# Altium PCB Tigershark 3D R1.8.PcbDoc (part 1 of 3)
Units mil, origin at the board's own origin, x right, y up, seen from the top; angles counter-clockwise.
Board outline 5500 x 4600 mil, 4 copper layers (Top Layer, Groun Plane, Power Plane, Bottom Layer), stack 61.73 mil thick; 307 components, 236 nets, 994 pads, 1215 vias.
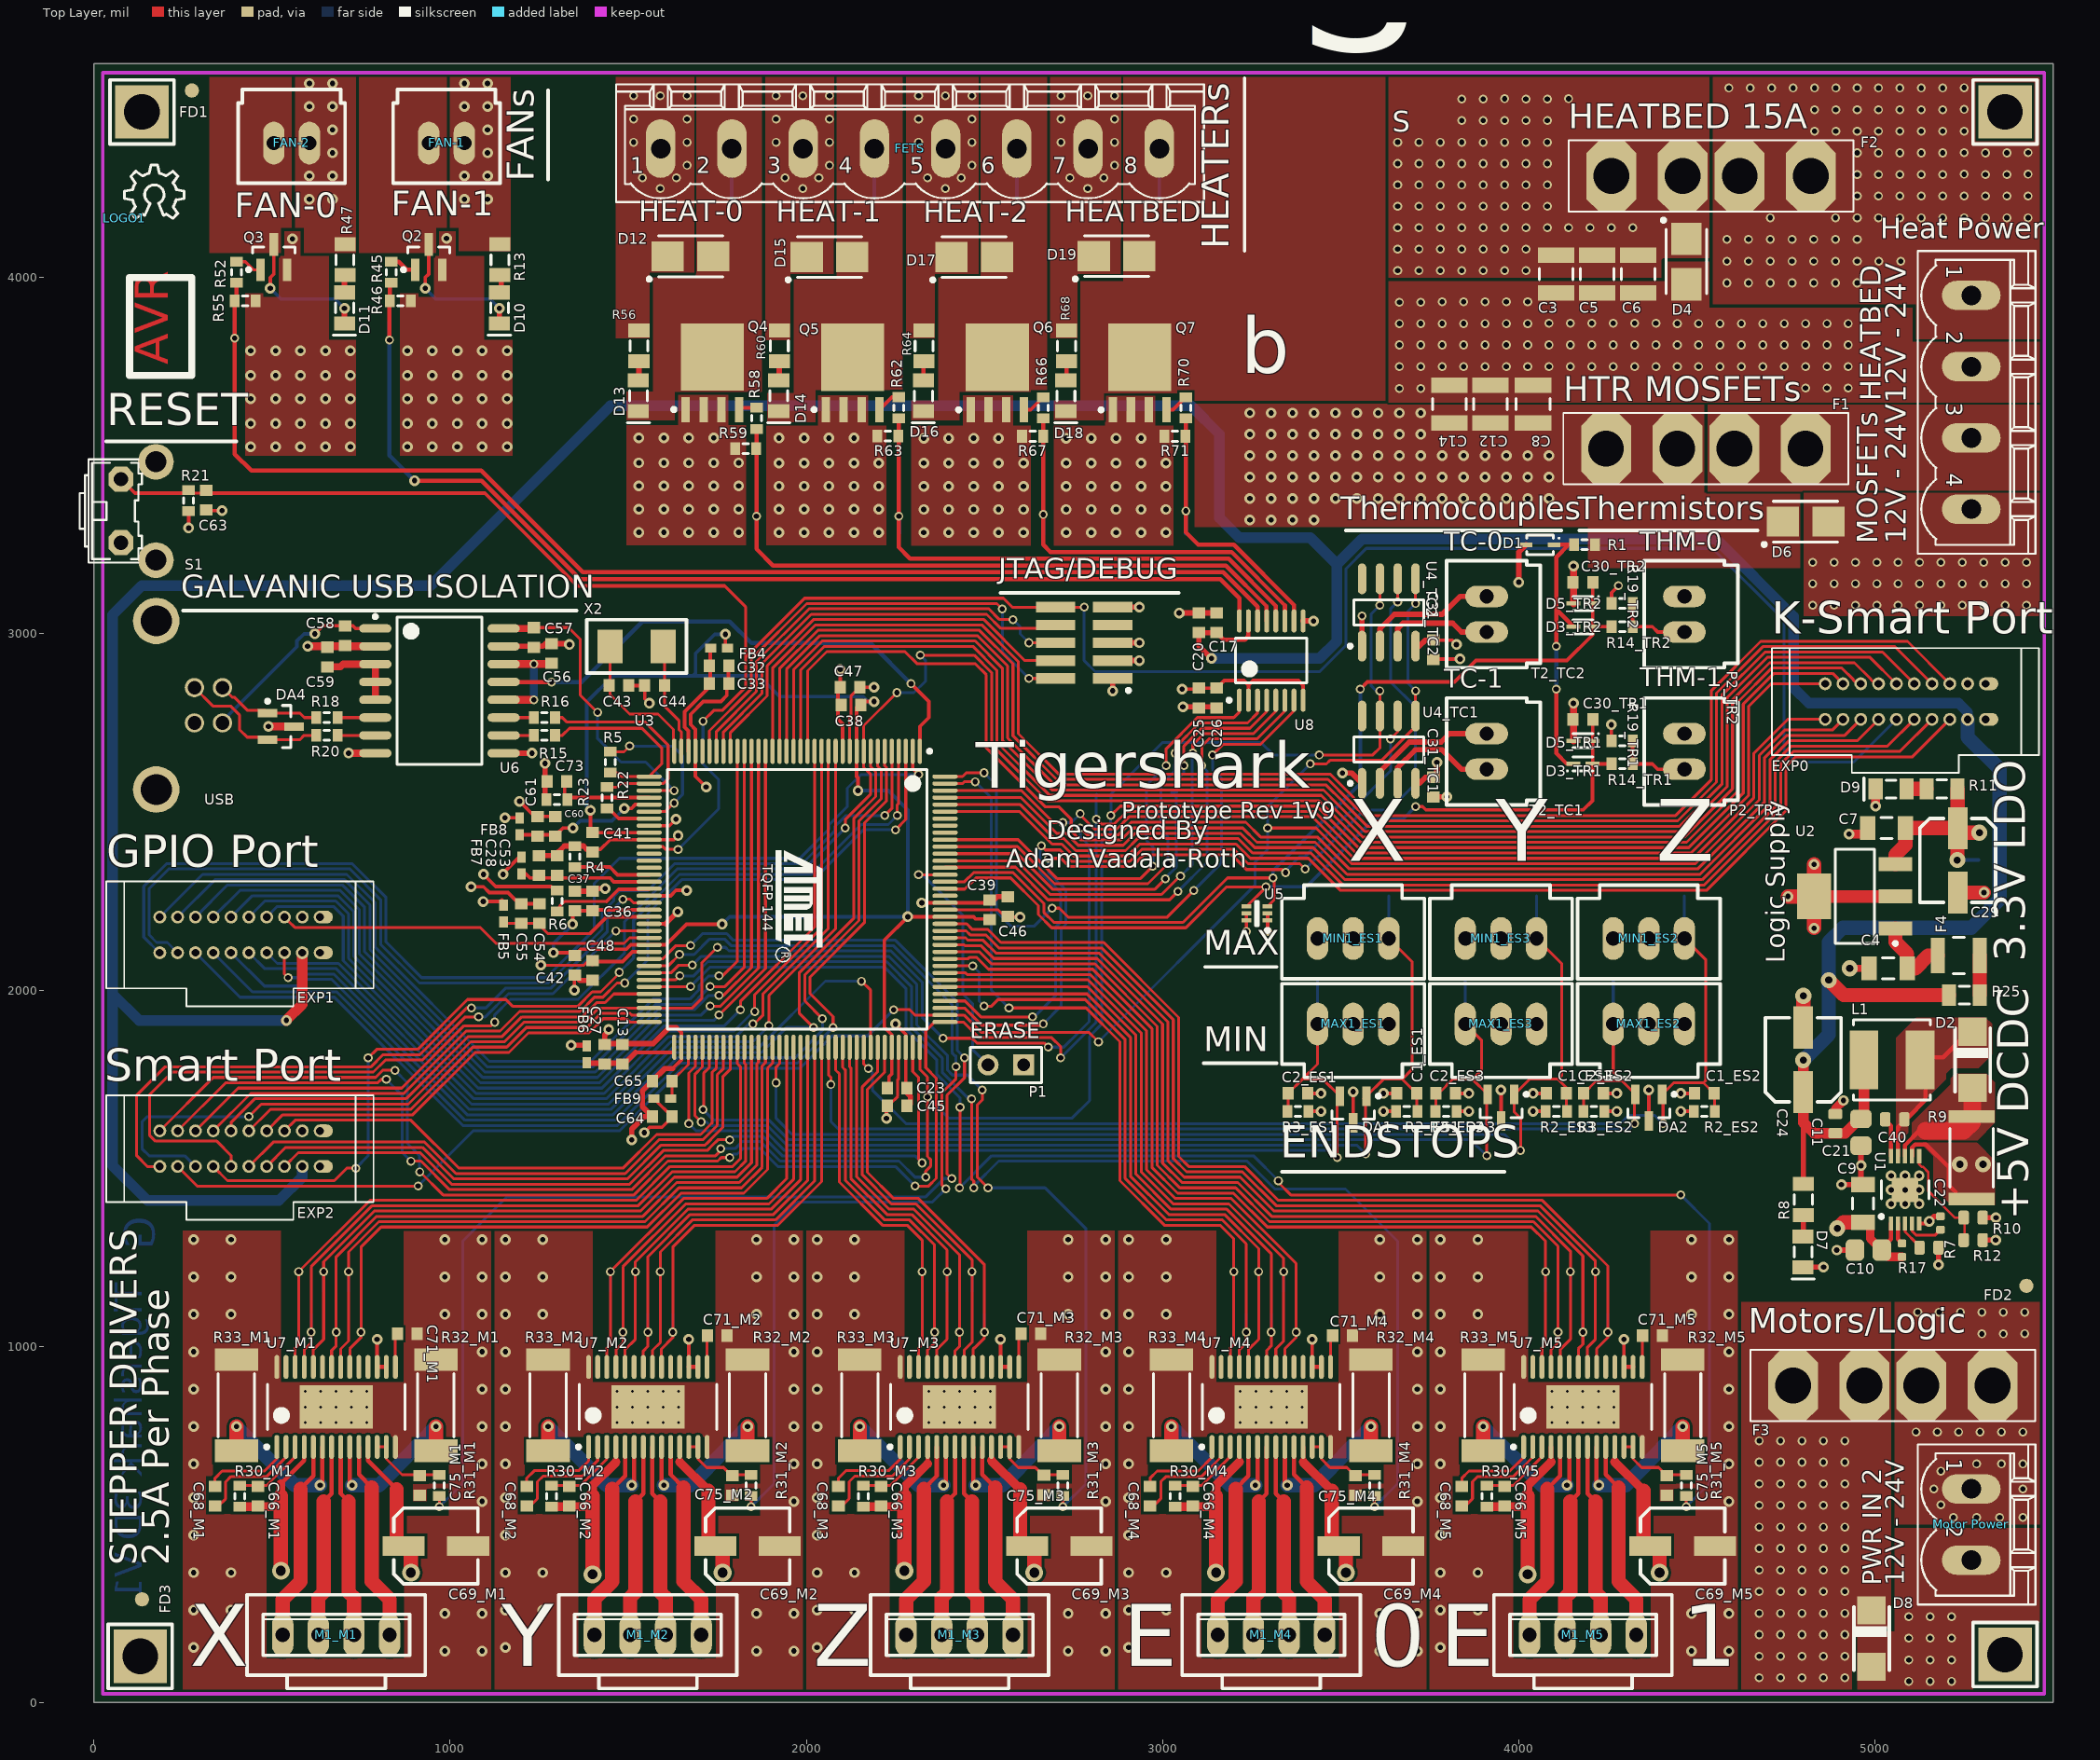
[diagram p0: Top Layer view]
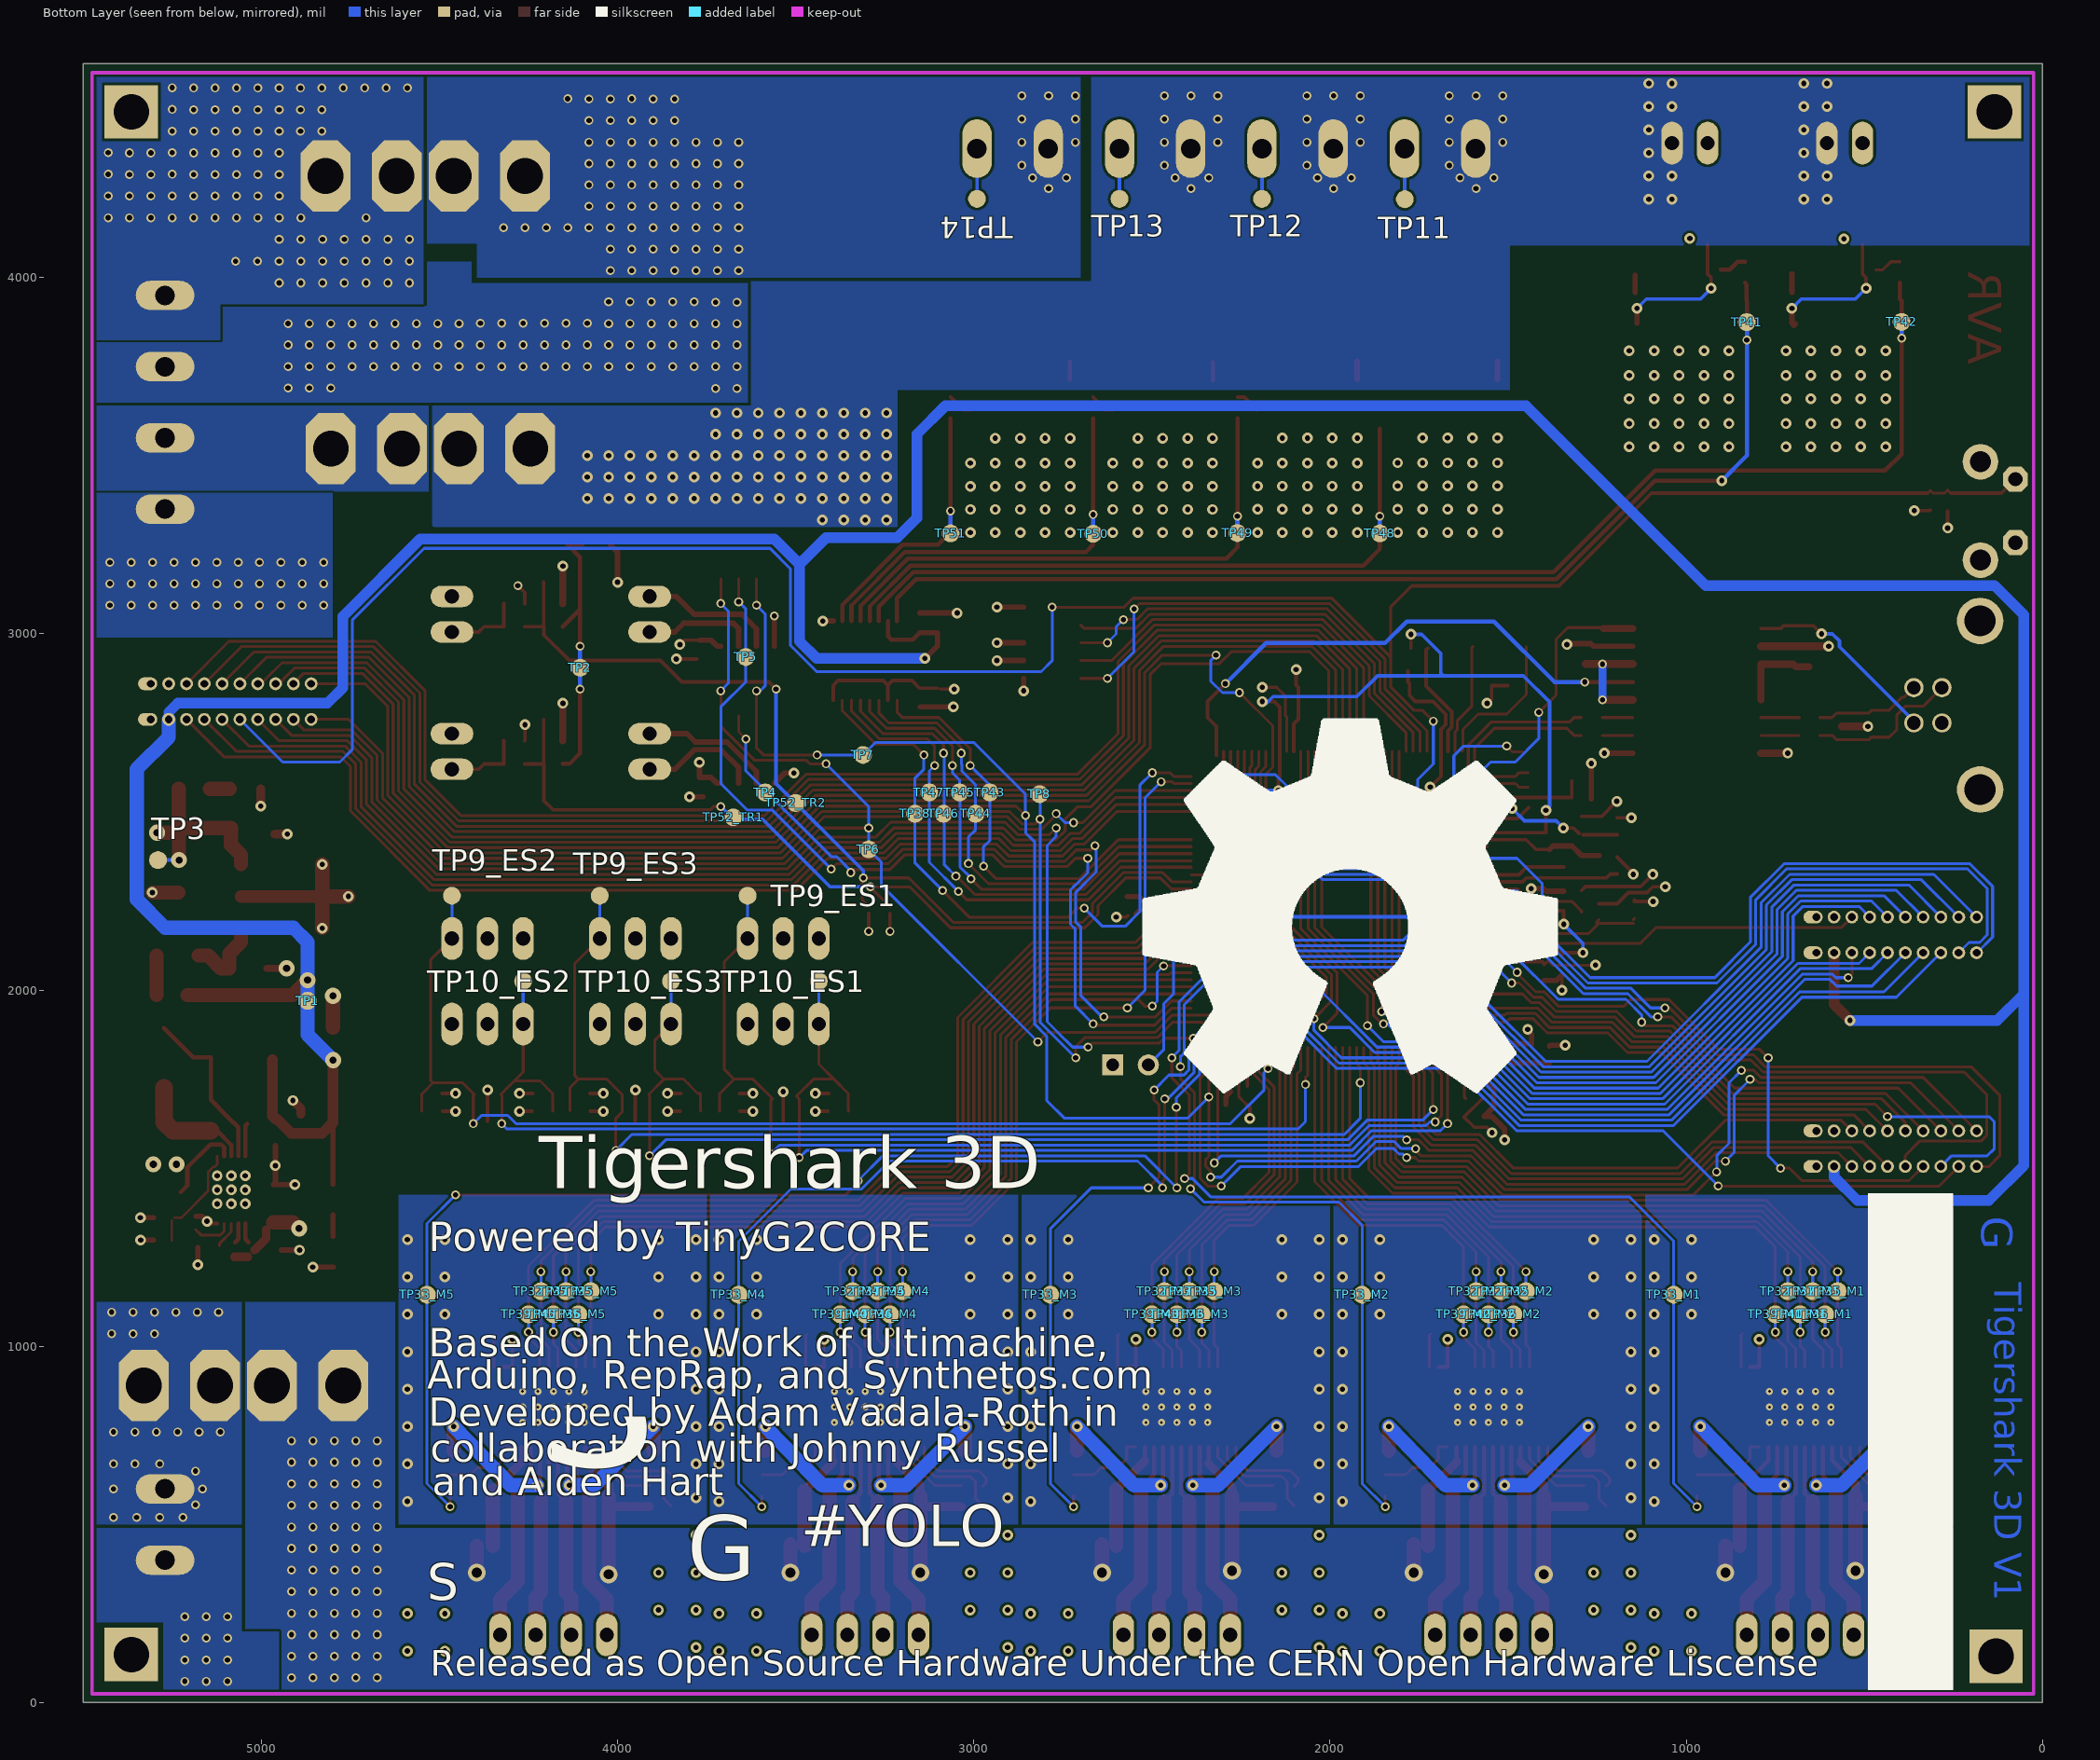
[diagram p1: Bottom Layer view, seen from below]
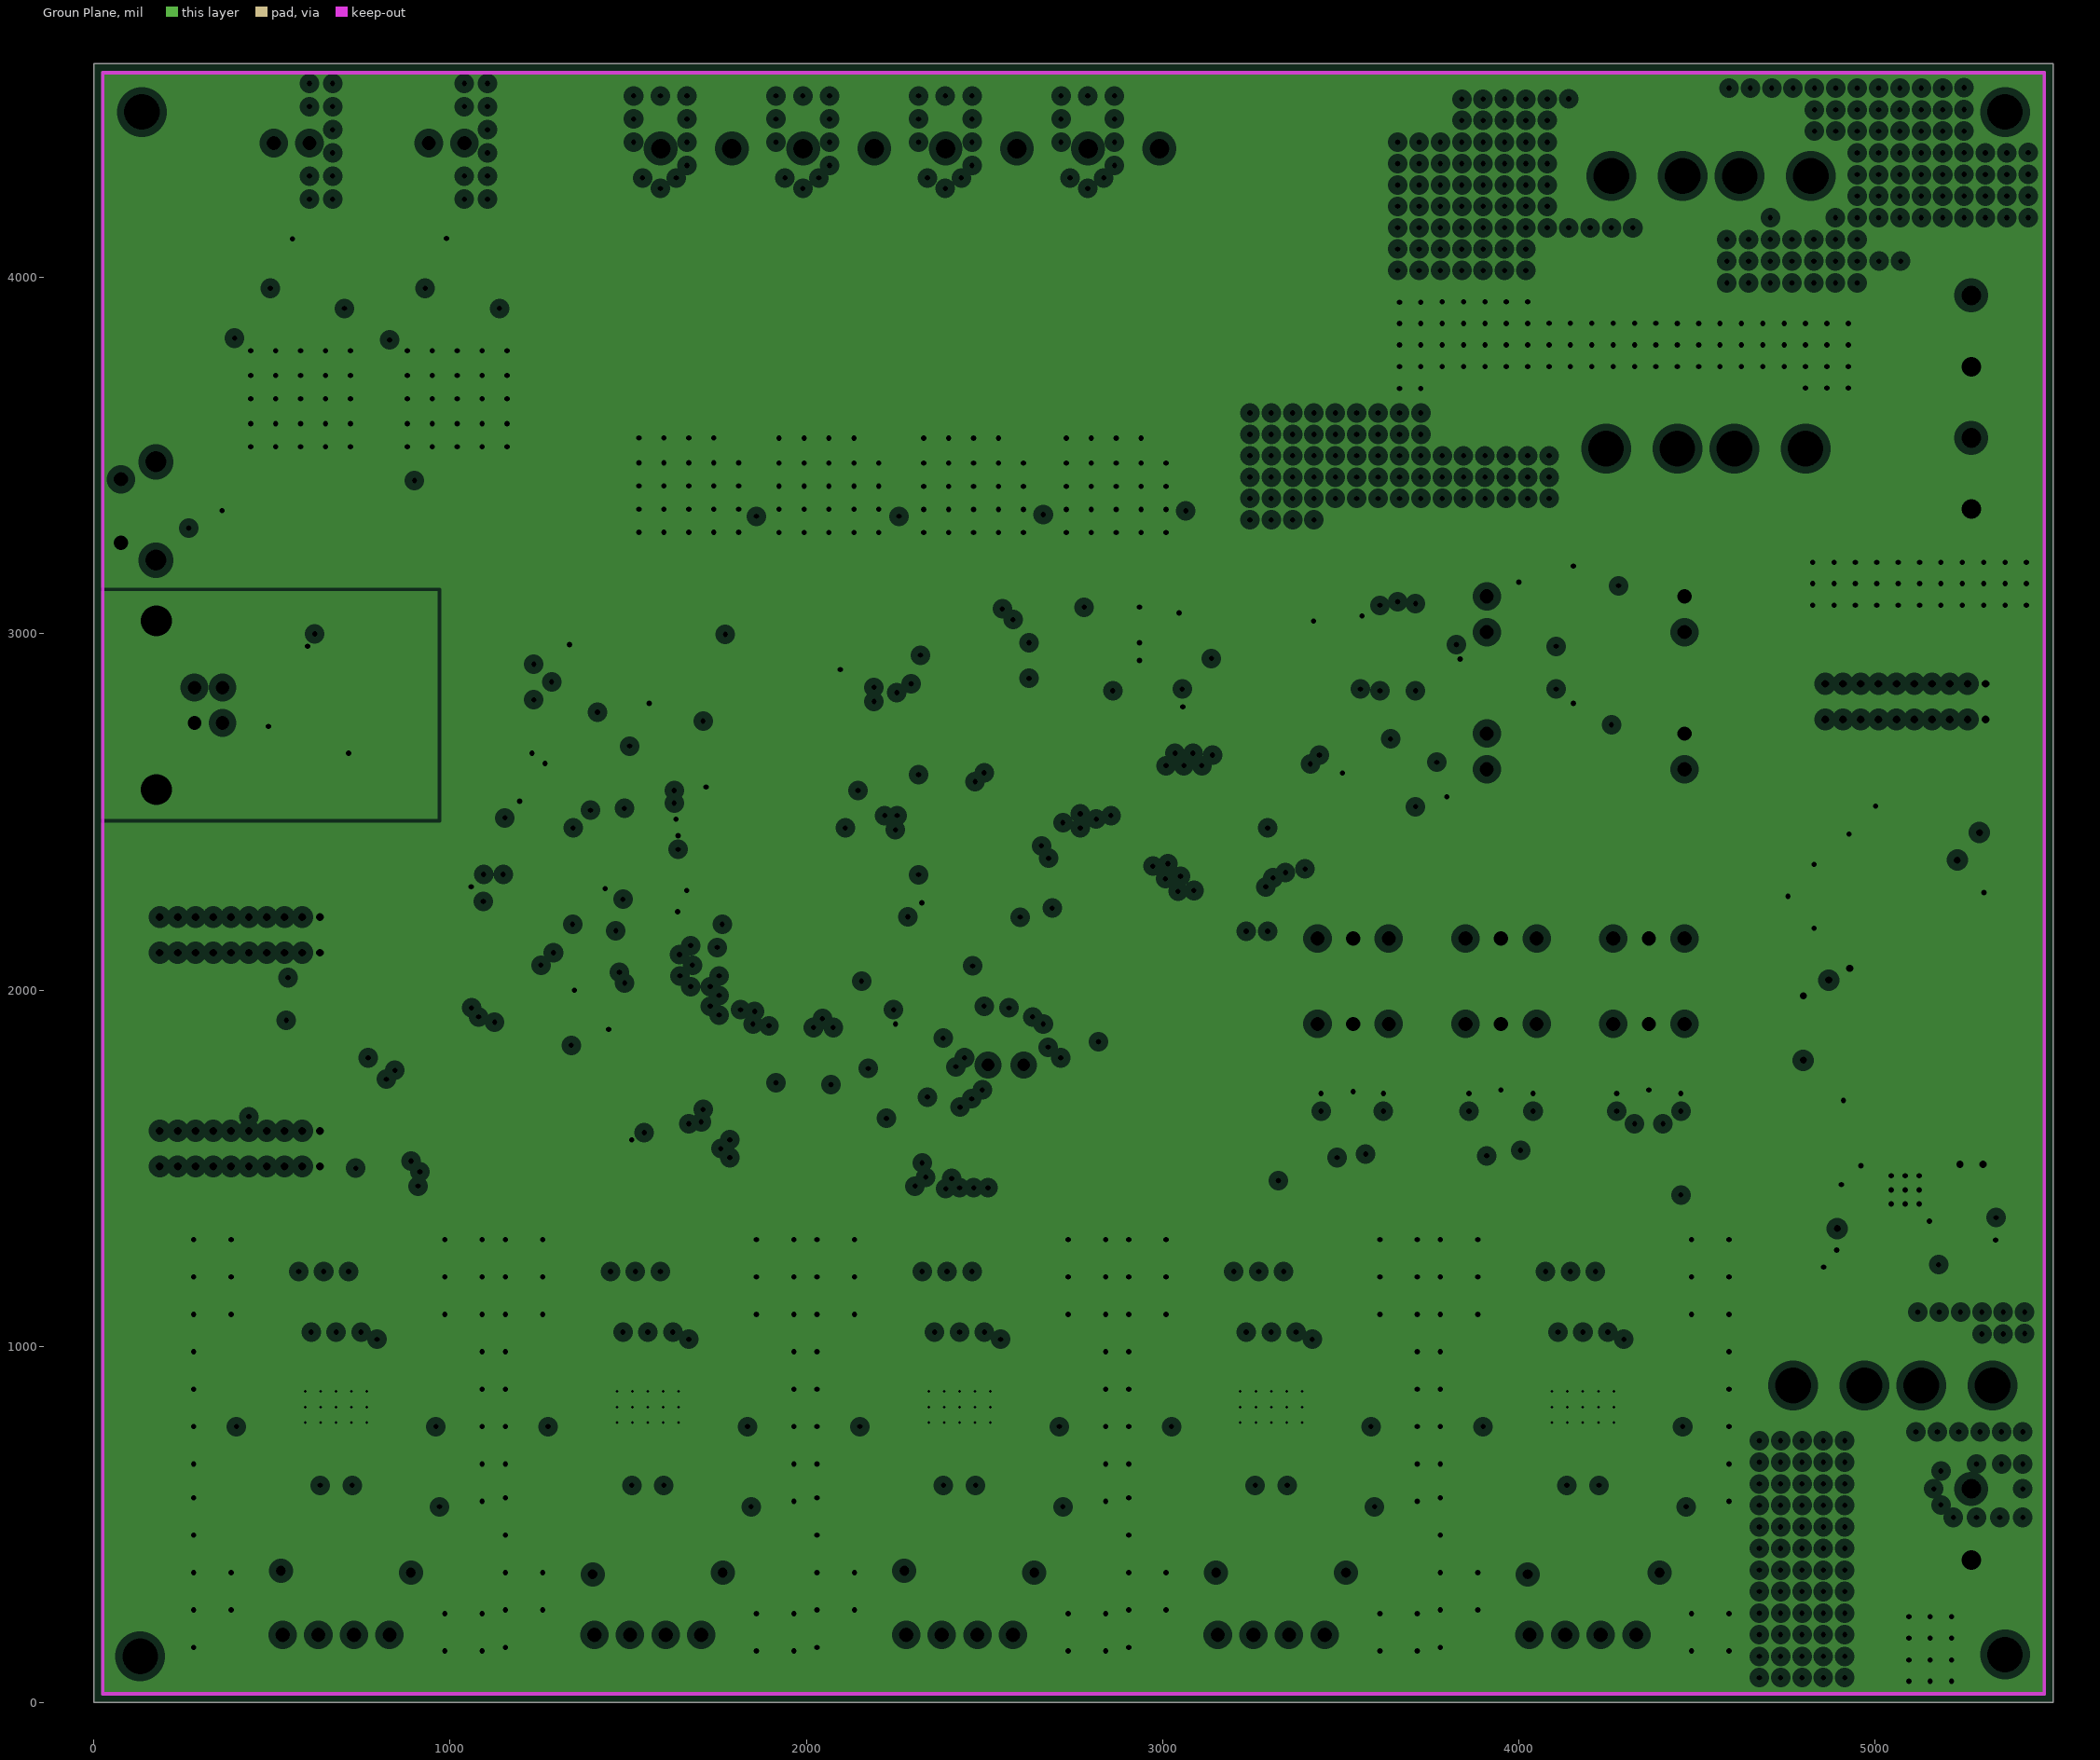
[diagram p2: Groun Plane, clearances drawn from the general rule]
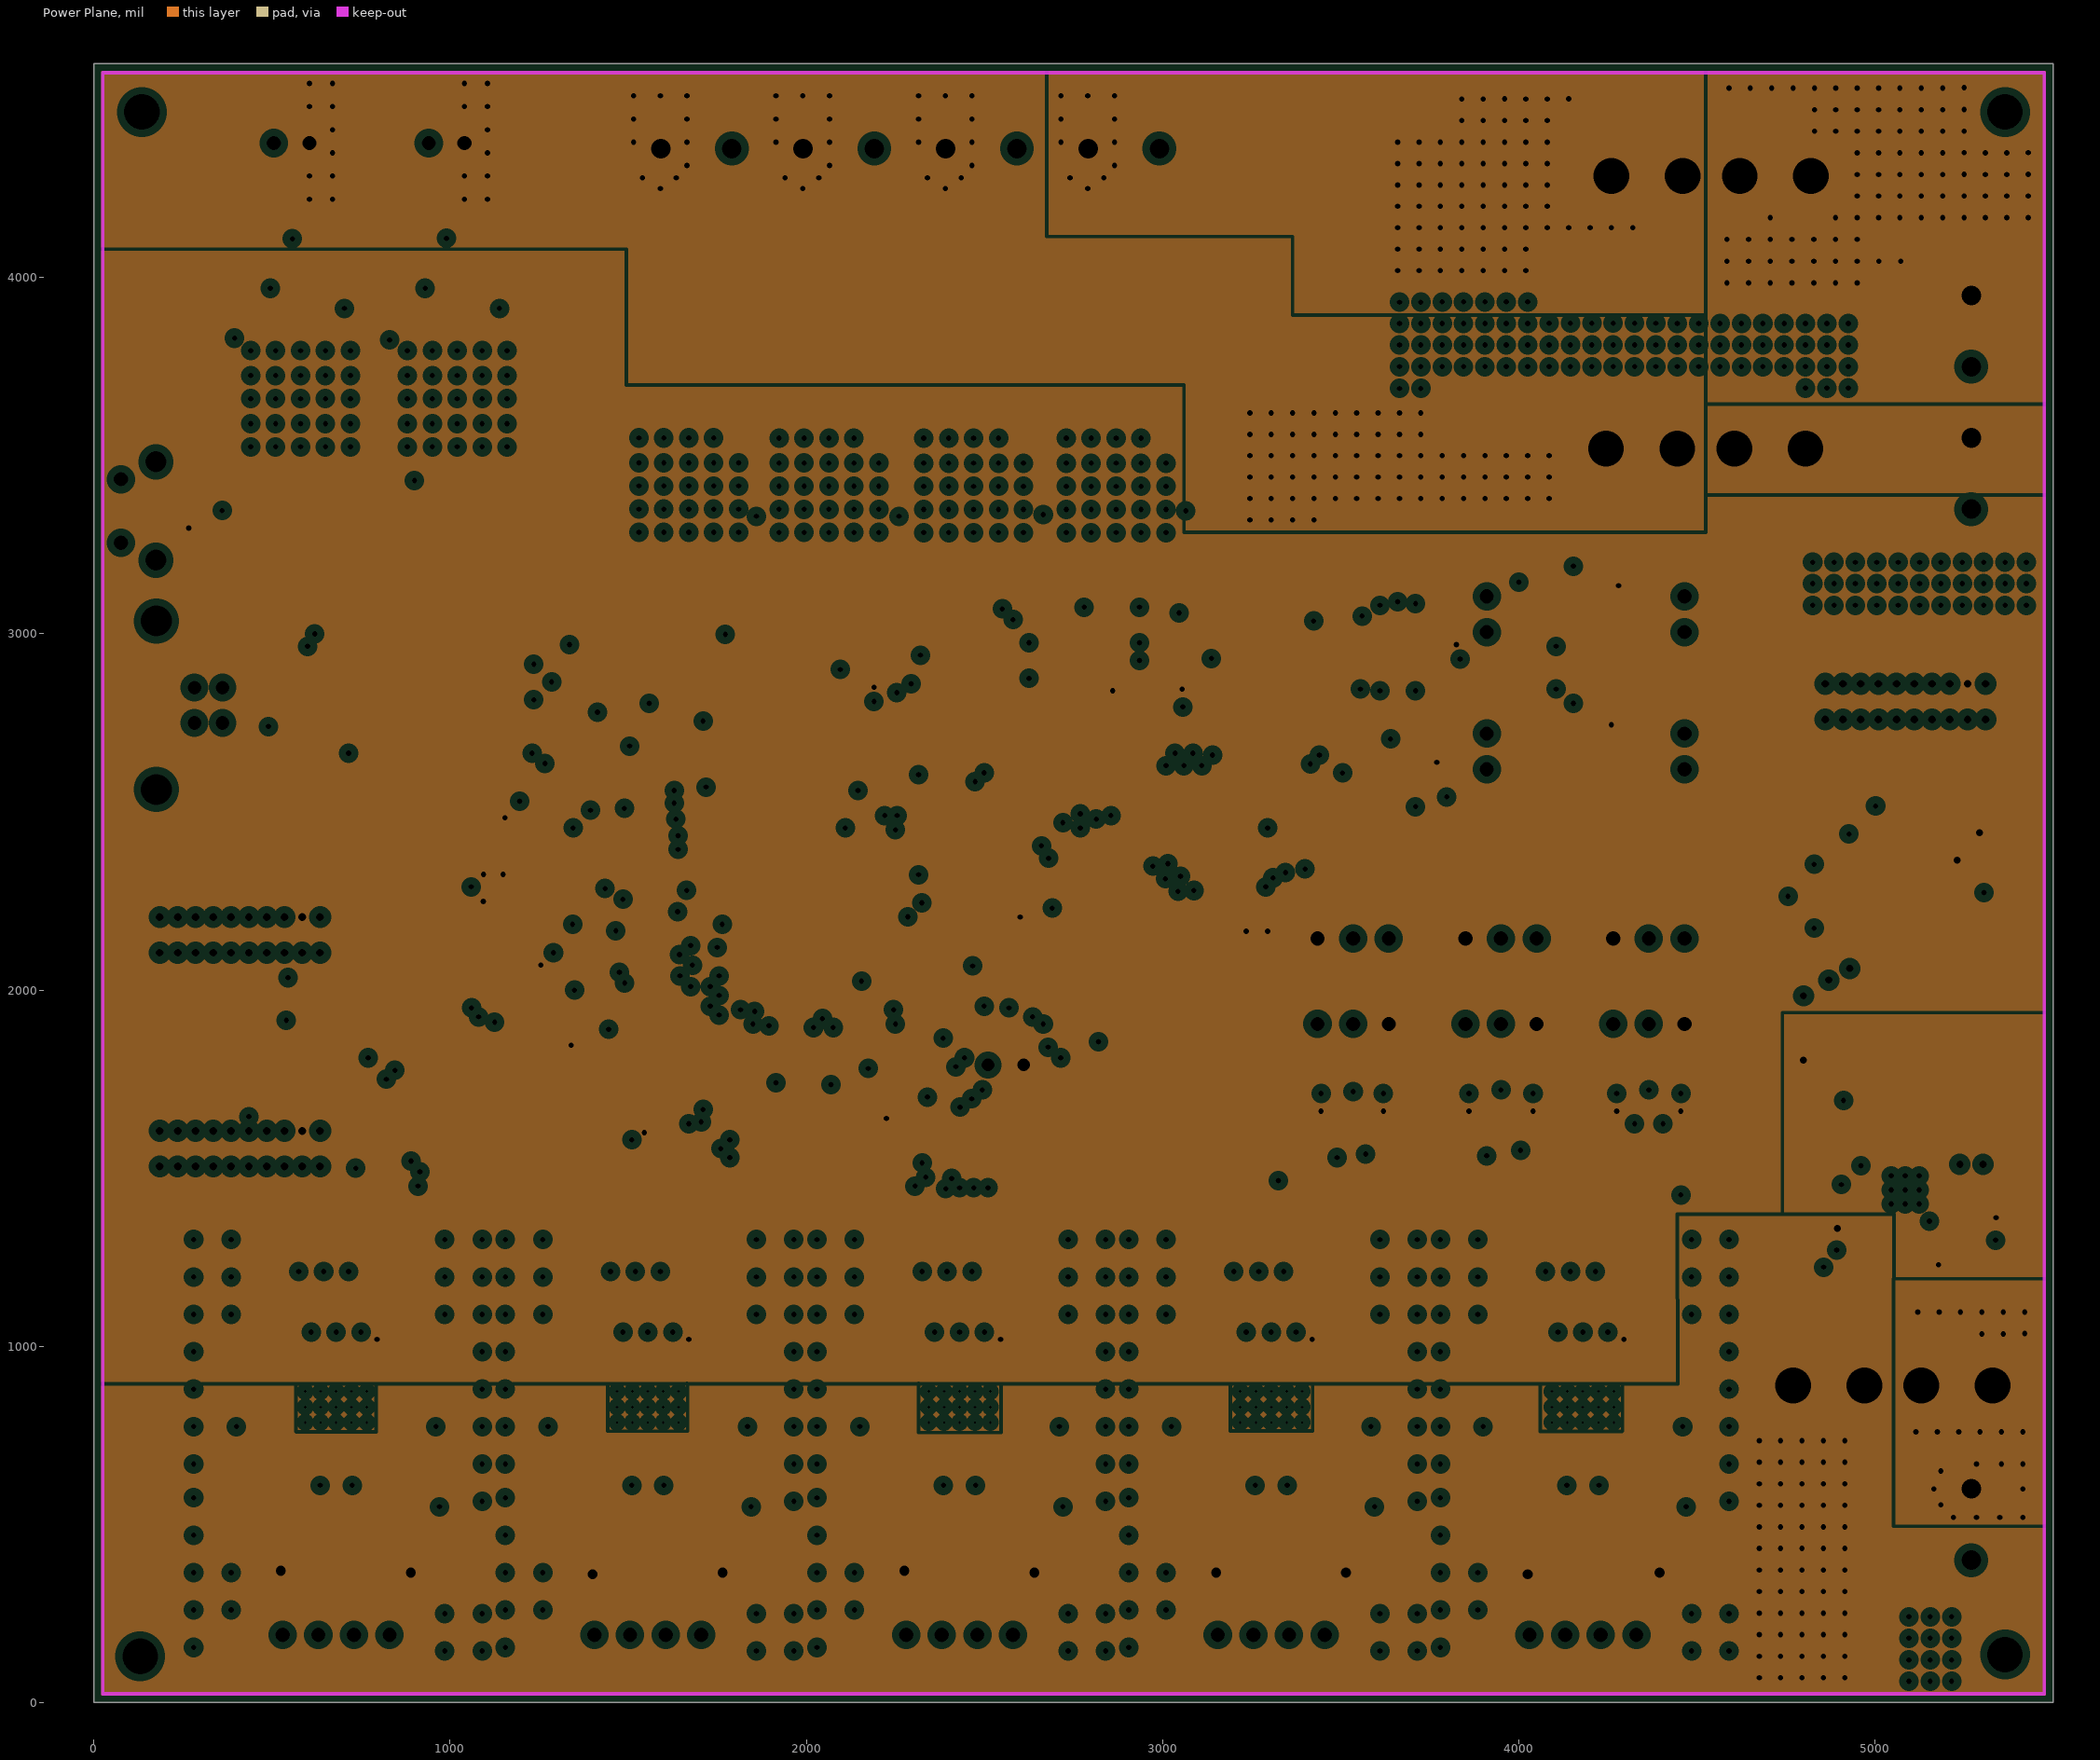
[diagram p3: Power Plane, clearances drawn from the general rule]

## Layer stack, top to bottom
Top Solder: solder mask 0.4, Solder Resist, Dk 3.5
Top Layer: signal copper 2.75
Dielectric1: prepreg 21.654, FR-4, Dk 4.2
Groun Plane: plane copper 1.4, net (Multiple Nets)
Dielectric2: core 10.236, FR-4, Dk 4.2
Power Plane: plane copper 1.4, net (Multiple Nets)
Dielectric3: prepreg 21.54, FR-4, Dk 4.2
Bottom Layer: signal copper 2.75
Bottom Solder: solder mask 0.4, Solder Resist, Dk 3.5

## Board outline
0,0 0,4600 5500,4600 5500,0

## Design rules (kind name [scope] priority, off if disabled: settings)
Clearance [All] p1: gap=7
ComponentClearance [All] p1: gap=0 collisioncheckmode=3 verticalgap=10 showdistances=FALSE
DiffPairsRouting [All] p1: maxlimit=10 minlimit=10 mostfreqgap=10 toplayer_minwidth=15 toplayer_maxwidth=15 toplayer_prefwidth=15 bottomlayer_minwidth=15 bottomlayer_maxwidth=15 bottomlayer_prefwidth=15 maxuncoupledlength=500
FanoutControl Fanout_SOIC [(InComponent('U8') AND InComponent('U7'))] p3: bgadir=Out bgaviamode=Centered fanoutstyle=Staggered fanoutdirection=Alternating viagrid=1 // Fanout_SOIC (Default Rule)
FanoutControl Fanout_Small [All] p4: bgadir=Out bgaviamode=Centered fanoutstyle=Auto fanoutdirection=Alternating viagrid=1 // Fanout_Small (Default Rule)
HoleSize [All] p1: absolutevalues=TRUE maxlimit=120 minlimit=1 maxpercent=80.000 minpercent=20.000
MinimumSolderMaskSliver [All] p1 off: minsoldermaskwidth=10
PlaneClearance [All] p1: clearance=20
PlaneConnect [All] p1: planeconnectstyle=Direct reliefexpansion=20 reliefentries=4 reliefconductorwidth=10 reliefairgap=10
PolygonConnect [All] p1: connectstyle=Direct reliefconductorwidth=45 reliefentries=4 polygonreliefangle="90 Angle" airgapwidth=10
RoomDefinition DriverChannelDRV88255 [InComponentClass('DriverChannelDRV88255')] p1: confinementstyle=ConfineIn formatcopy=TRUE lockcomponents=FALSE outline 3750,25 4625,25 4625,1425 3750,1425
RoomDefinition DriverChannelDRV88254 [InComponentClass('DriverChannelDRV88254')] p2: confinementstyle=ConfineIn formatcopy=TRUE lockcomponents=FALSE outline 2875,25 3750,25 3750,1425 2875,1425
RoomDefinition DriverChannelDRV88253 [InComponentClass('DriverChannelDRV88253')] p3: confinementstyle=ConfineIn formatcopy=TRUE lockcomponents=FALSE outline 2000,25 2875,25 2875,1425 2000,1425
RoomDefinition DriverChannelDRV88252 [InComponentClass('DriverChannelDRV88252')] p4: confinementstyle=ConfineIn formatcopy=TRUE lockcomponents=FALSE outline 1125,25 2000,25 2000,1425 1125,1425
RoomDefinition DriverChannelDRV88251 [InComponentClass('DriverChannelDRV88251')] p5: confinementstyle=ConfineIn formatcopy=TRUE lockcomponents=FALSE outline 250,25 1125,25 1125,1425 250,1425
RoutingVias [All] p1: holewidth=15 width=25 viastyle="Through Hole" minholewidth=15 minwidth=25 maxholewidth=28 maxwidth=50
SilkToSilkClearance [All] p1 off: silktosilkclearance=10
SilkToSolderMaskClearance SilkscreenOverComponentPads [IsPad] p1 off: minsilkscreentomaskgap=10 clearancetoexposedcopper=TRUE
SolderMaskExpansion [All] p1: expansion=4
Width [All] p1: maxlimit=50 minlimit=7 preferedwidth=8
19 further rules are at their usual default settings.

## Classes and differential pairs
channel class TR: TR1 TR2
channel class TC: TC1 TC2
channel class M: M1 M2 M3 M4 M5
channel class ES: ES1 ES2 ES3
component class TR2: C30_TR2 D3_ThermistorChannel2 D3_TR2 D5_ThermistorChannel2 D5_TR2 P2_TR2 R14_TR2 R19_ThermistorChannel2 R19_TR2 TP52_TR2
component class TR1: C30_ThermistorChannel1 C30_TR1 D3_ThermistorChannel1 D3_TR1 D5_ThermistorChannel1 D5_TR1 P2_TR1 R14_TR1 R19_ThermistorChannel1 R19_TR1 TP52_TR1
net class THERM_AN_BUS[1..2]: THERM_AN0
net class TC_CS_BUS[1..2]: TC_CS0
net class SCLK[1..2]: SCLK0 SCLK1 SCLK2
net class MISO[1..2]: MISO0 MISO1 MISO2
net class MIN_ES_BUS[1..3]: MIN_ES0
net class MAX_ES_BUS[1..3]: MAX_ES0
component class Designator: C3 C4 C5 C6 C7 C8 C9 C10 C11 C12 C14 C21 C22 C24 C29 C40 D1 D2 D4 D6 D7 D8 D9 F1 F2 F3 F4 "Heat Power" L1 "Motor Power" R1 R7 R8 R9 R10 R11 R12 R17 R25 TP1 TP2 TP3 U1 U2
component class "ATSAM3X8E Main Controller": C13 C23 C27 C28 C32 C33 C36 C37 C38 C39 C41 C42 C43 C44 C45 C46 C47 C48 C53 C54 C55 C56 C57 C58 C59 C60 C61 C63 C64 C65 C73 DA1 DA2 DA3 DA4 EXP0 EXP1 EXP2 FB4 FB5 FB6 FB7 FB8 FB9 FD1 FD2 FD3 JTAG/DEBUG LOGO1 microSD P1 R4 R5 R6 R15 R16 R18 R20 R21 R22 R23 S1 TP4 TP5 TP6 TP7 TP8 U3 U5 U6 USB X2
component class M1: C66_M1 C68_M1 C69_M1 C71_M1 C75_M1 M1_M1 R30_M1 R31_M1 R32_DriverChannelDRV88251 R32_M1 R33_DriverChannelDRV88251 R33_M1 TP32_M1 TP33_M1 TP35_M1 TP36_M1 TP37_M1 TP39_M1 TP40_M1 U7_M1
component class M2: C66_M2 C68_M2 C69_M2 C71_M2 C75_M2 M1_M2 R30_M2 R31_M2 R32_DriverChannelDRV88252 R32_M2 R33_DriverChannelDRV88252 R33_M2 TP32_M2 TP33_M2 TP35_M2 TP36_M2 TP37_M2 TP39_M2 TP40_M2 U7_M2
component class M3: C66_M3 C68_M3 C69_M3 C71_M3 C75_M3 M1_M3 R30_M3 R31_M3 R32_DriverChannelDRV88253 R32_M3 R33_DriverChannelDRV88253 R33_M3 TP32_M3 TP33_M3 TP35_M3 TP36_M3 TP37_M3 TP39_M3 TP40_M3 U7_M3
component class M4: C66_M4 C68_M4 C69_M4 C71_M4 C75_M4 M1_M4 R30_M4 R31_M4 R32_DriverChannelDRV88254 R32_M4 R33_DriverChannelDRV88254 R33_M4 TP32_M4 TP33_M4 TP35_M4 TP36_M4 TP37_M4 TP39_M4 TP40_M4 U7_M4
component class M5: C66_M5 C68_M5 C69_M5 C71_M5 C75_M5 M1_M5 R30_M5 R31_M5 R32_DriverChannelDRV88255 R32_M5 R33_DriverChannelDRV88255 R33_M5 TP32_M5 TP33_M5 TP35_M5 TP36_M5 TP37_M5 TP39_M5 TP40_M5 U7_M5
component class ES1: C1_ES1 C2_ES1 MAX1_ES1 MIN1_ES1 R2_ES1 R3_ES1 TP9_ES1 TP10_ES1
component class ES2: C1_ES2 C2_ES2 MAX1_ES2 MIN1_ES2 R2_ES2 R3_ES2 TP9_ES2 TP10_ES2
component class ES3: C1_ES3 C2_ES3 MAX1_ES3 MIN1_ES3 R2_ES3 R3_ES3 TP9_ES3 TP10_ES3
component class TC1: C31_TC1 T2_TC1 U4_TC1 U4_ThermocoupleChannel1
component class TC2: C31_TC2 T2_TC2 U4_TC2 U4_ThermocoupleChannel2
component class "U_MOSFETs and Driver": C17 C20 C25 C26 D10 D11 D12 D13 D14 D15 D16 D17 D18 D19 FAN-1 FAN-2 FETS Q2 Q3 Q4 Q5 Q6 Q7 R13 R45 R46 R47 R52 R55 R56 R58 R59 R60 R62 R63 R64 R66 R67 R68 R70 R71 TP11 TP12 TP13 TP14 TP38 TP41 TP42 TP43 TP44 TP45 TP46 TP47 TP48 TP49 TP50 TP51 U8
differential pair R: +R_P -R_N
differential pair UD: +UD_P -UD_N
differential pair UI: +UI_P -UI_N
differential pair UMCU: +UMCU_P -UMCU_N

## Components (designator, comment, footprint, x,y, rotation, side; value= is the part's Value field where it differs from the comment)
C1_ES1 "0603" 1608[0603] 3685.47,1710 r180 top (schematic designator C1)
C1_ES2 "0603" 1608[0603] 4520.47,1710 r180 top (schematic designator C1)
C1_ES3 "0603" 1608[0603] 4105.47,1710 r180 top (schematic designator C1)
C2_ES1 "0603" 1608[0603] 3380,1710 r0 top (schematic designator C2)
C2_ES2 "0603" 1608[0603] 4210,1710 r0 top (schematic designator C2)
C2_ES3 "0603" 1608[0603] 3795,1710 r0 top (schematic designator C2)
C3 "1210" C1210 4105,4010 r90 top
C4 "1206" C1206 5037,2061 r0 top
C5 "1210" C1210 4220,4010 r90 top
C6 "1210" C1210 4335,4010 r90 top
C7 "1206" C1206 5032,2455 r0 top
C8 "1210" C1210 4040,3645 r270 top
C9 "4.7uF" C1206 4966.57,1401.31 r90 top
C10 "1uF" C0805 4981.57,1270.31 r180 top
C11 "100nF" C0603 4888.57,1625.31 r90 top
C12 "1210" C1210 3920,3645 r270 top
C13 "0603" 1608[0603] 1483.9,1820 r270 top
C14 "1210" C1210 3805,3645 r270 top
C17 "0603" 1608[0603] 3152,3031 r90 top
C20 "0603" 1608[0603] 3102,3031 r90 top
C21 "10uF" C0805 4960.57,1601.31 r270 top
C22 "1uF" C0402 5183.57,1346.31 r90 top
C23 "0603" 1608[0603] 2255,1725 r180 top
C24 "VS C" "Panasonic VS C" 4683.57,1924.31 r270 top
C25 "0603" 1608[0603] 3102,2820 r90 top
C26 "0603" 1608[0603] 3152,2820 r270 top
C27 "0603" 1608[0603] 1433.9,1820 r270 top
C28 "0603" 1608[0603] 1250,2350 r270 top
C29 "VS C" "Panasonic VS C" 5347,2244 r90 top
C30_TR1 "Cap Semi" 1608[0603] 4180,2760 r0 top (schematic designator C30)
C30_TR2 "Cap Semi" 1608[0603] 4180,3145 r0 top (schematic designator C30)
C31_TC1 "Cap Semi" 1608[0603] 3760,2570 r90 top (schematic designator C31)
C31_TC2 "Cap Semi" 1608[0603] 3760,2955 r90 top (schematic designator C31)
C32 "0603" 1608[0603] 1755,2910 r180 top
C33 "0603" 1608[0603] 1755,2860 r180 top
C36 "0603" 1608[0603] 1400,2250 r270 top
C37 "0603" 1608[0603] 1350,2250 r270 top
C38 "0603" 1608[0603] 2125,2800 r0 top
C39 "0603" 1608[0603] 2515,2225 r270 top
C40 "100nF" C0603 5055.57,1637.31 r0 top
C41 "0603" 1608[0603] 1400,2415 r90 top
C42 "0603" 1608[0603] 1350,2069.19 r90 top
C43 "0603" 1608[0603] 1473.9,2855 r180 top
C44 "0603" 1608[0603] 1573.9,2855 r0 top
C45 "0603" 1608[0603] 2255,1675 r180 top
C46 "0603" 1608[0603] 2565,2235 r270 top
C47 "0603" 1608[0603] 2122.44,2850 r0 top
C48 "0603" 1608[0603] 1400,2055 r90 top
C53 "0603" 1608[0603] 1300,2350 r270 top
C54 "0603" 1608[0603] 1251.22,2215 r270 top
C55 "0603" 1608[0603] 1200,2215 r270 top
C56 "0603" 1608[0603] 1285,2945 r270 top
C57 "0603" 1608[0603] 1235,2990 r90 top
C58 "0603" 1608[0603] 705,2995 r90 top
C59 "0603" 1608[0603] 655,2935 r270 top
C60 "0603" 1608[0603] 1295,2460 r270 top
C61 "0603" 1608[0603] 1245,2460 r270 top
C63 "Cap Semi" 1608[0603] 315,3375 r90 top
C64 "0603" 1608[0603] 1595,1645 r0 top
C65 "0603" 1608[0603] 1595,1745 r0 top
C66_M1 "0603" 1608[0603] 460,580 r90 top (schematic designator C66)
C66_M2 "0603" 1608[0603] 1335,580 r90 top (schematic designator C66)
C66_M3 "0603" 1608[0603] 2210,580 r90 top (schematic designator C66)
C66_M4 "0603" 1608[0603] 3085,580 r90 top (schematic designator C66)
C66_M5 "0603" 1608[0603] 3960,580 r90 top (schematic designator C66)
C68_M1 "0603" 1608[0603] 340,580 r270 top (schematic designator C68)
C68_M2 "0603" 1608[0603] 1215,580 r270 top (schematic designator C68)
C68_M3 "0603" 1608[0603] 2090,580 r270 top (schematic designator C68)
C68_M4 "0603" 1608[0603] 2965,580 r270 top (schematic designator C68)
C68_M5 "0603" 1608[0603] 3840,580 r270 top (schematic designator C68)
C69_M1 "VS C" "Panasonic VS C" 1080,555 r180 top (schematic designator C69)
C69_M2 "VS C" "Panasonic VS C" 1955,555 r180 top (schematic designator C69)
C69_M3 "VS C" "Panasonic VS C" 2830,555 r180 top (schematic designator C69)
C69_M4 "VS C" "Panasonic VS C" 3705,555 r180 top (schematic designator C69)
C69_M5 "VS C" "Panasonic VS C" 4580,555 r180 top (schematic designator C69)
C71_M1 "0603" 1608[0603] 880,1035 r180 top (schematic designator C71)
C71_M2 "0603" 1608[0603] 1750,1030 r180 top (schematic designator C71)
C71_M3 "0603" 1608[0603] 2630,1035 r180 top (schematic designator C71)
C71_M4 "0603" 1608[0603] 3505,1030 r180 top (schematic designator C71)
C71_M5 "0603" 1608[0603] 4375,1030 r180 top (schematic designator C71)
C73 "0603" 1608[0603] 1300,2586.22 r0 top
C75_M1 "0603" 1608[0603] 915,610 r90 top locked (schematic designator C75)
C75_M2 "0603" 1608[0603] 1792,610 r90 top (schematic designator C75)
C75_M3 "0603" 1608[0603] 2667,611 r90 top (schematic designator C75)
C75_M4 "0603" 1608[0603] 3542,610 r90 top (schematic designator C75)
C75_M5 "0603" 1608[0603] 4415,610 r90 top locked (schematic designator C75)
D1 "SZMM3Z4V7T1G" SZMM3Z4V7T1G 4060,3250 r0 top
D2 "SK310A-TP" SMA-SM 5273.57,1804.31 r270 top
D3_TR1 "Diode 1N4148" 1N4148WT 4180,2635 r180 top (schematic designator D3)
D3_TR2 "Diode 1N4148" 1N4148WT 4180,3020 r180 top (schematic designator D3)
D4 "SK310A-TP" SK310A-TP 4470,4045 r90 top
D5_TR1 "Diode 1N4148" 1N4148WT 4180,2700 r0 top (schematic designator D5)
D5_TR2 "Diode 1N4148" 1N4148WT 4180,3085 r0 top (schematic designator D5)
D6 "SK310A-TP" SK310A-TP 4805,3315 r180 top
D7 "LED2" "SM 0805 polarized" 4754.57,1185.31 r90 top
D8 "SMAJ30A" SMA-SM 4990,180 r270 top
D9 "LED2" "SM 0805 polarized" 4965,2608 r0 top
D10 "LED1" "SM 0805 polarized" 1095,3835 r90 top
D11 "LED1" "SM 0805 polarized" 660,3835 r90 top
D12 "B240A-13-F" SK310A-TP 1675,4059.75 r180 top
D13 "LED1" "SM 0805 polarized" 1485,3588.64 r90 top
D14 "LED1" "SM 0805 polarized" 1879,3588.64 r90 top
D15 "B240A-13-F" SK310A-TP 2065,4057.75 r180 top
D16 "LED1" "SM 0805 polarized" 2285,3588.22 r90 top
D17 "B240A-13-F" SK310A-TP 2471,4057.32 r180 top
D18 "LED1" "SM 0805 polarized" 2685,3588.22 r90 top
D19 "B240A-13-F" SK310A-TP 2871,4059.96 r180 top
DA1 "PESDxL2BT" SOT95P230X110-3N 3535,1665 r270 top
DA2 "PESDxL2BT" SOT95P230X110-3N 4365,1670 r270 top
DA3 "PESDxL2BT" SOT95P230X110-3N 3950,1670 r270 top
DA4 "PESDxL2BT" SOT95P230X110-3N 525,2740 r0 top
EXP0 "10X2-0.1X0.05" 10X2-0.05X0.1w 5085,2810 r180 top
EXP1 "10X2-0.1X0.05" 10X2-0.05X0.1w 410,2155 r180 top
EXP2 "10X2-0.1X0.05" 10X2-0.05X0.1w 410,1555 r180 top
F1 "3522-2" "3522-2 - WAVE SOLDER" 4525,3520 r180 top
F2 "3522-2" "3522-2 - WAVE SOLDER" 4540,4285 r180 top
F3 "3522-2" "3522-2 - WAVE SOLDER" 5050,890 r180 top
F4 "LittleFuse F1210" F1210_M 5235,2097 r0 top
FAN-1 "Molex 70543-02" 70543-02 990,4377.58 r180 top
FAN-2 "Molex 70543-02" 70543-02 555,4377.58 r180 top
FB4 "BLM15HG601SN1D" BLM18PG121SN1D 1755,2960 r180 top
FB5 "BLM15HG601SN1D" BLM18PG121SN1D 1150,2215 r270 top
FB6 "BLM15HG601SN1D" BLM18PG121SN1D 1383.9,1820 r270 top
FB7 "BLM15HG601SN1D" BLM18PG121SN1D 1200,2350 r270 top
FB8 "BLM15HG601SN1D" BLM18PG121SN1D 1195,2460 r270 top
FB9 "BLM15HG601SN1D" BLM18PG121SN1D 1595,1695 r0 top
FD1 "FIDUCIAL" FIDUCIAL-1X2 275,4525 r0 top
FD2 "FIDUCIAL" FIDUCIAL-1X2 5425,1170 r0 top
FD3 "FIDUCIAL" FIDUCIAL-1X2 135,290 r0 top
FETS "con-phoenix-508 - 8" MSTBV4#1 2291,4362.32 r90 top
"Heat Power" "con-phoenix-508 - 4" MSTBV4#2 5270,3650 r270 top
JTAG/DEBUG "FTSH-105-XX-X-DV" FTSH-105-XX-X-DV 2780,2975 r270 top
L1 "XAL5050-153MEB" XAL50xx-153 5047.57,1804.31 r180 top
LOGO1 "OSHW_LOGO_8MILX0150-NT" OSHW_8X150_NOTEXT 85.79,4166.42 r0 top
M1_M1 "Molex 0705430003" 4POL254 680,190 r0 top (schematic designator M1)
M1_M2 "Molex 0705430003" 4POL254 1555,190 r0 top (schematic designator M1)
M1_M3 "Molex 0705430003" 4POL254 2430,190 r0 top (schematic designator M1)
M1_M4 "Molex 0705430003" 4POL254 3305,190 r0 top (schematic designator M1)
M1_M5 "Molex 0705430003" 4POL254 4180,190 r0 top (schematic designator M1)
MAX1_ES1 "Molex 70543-03" 70543-03 3535,1905 r0 top (schematic designator MAX1)
MAX1_ES2 "Molex 70543-03" 70543-03 4365,1905 r0 top (schematic designator MAX1)
MAX1_ES3 "Molex 70543-03" 70543-03 3950,1905 r0 top (schematic designator MAX1)
MIN1_ES1 "Molex 70543-03" 70543-03 3535,2145 r180 top locked (schematic designator MIN1)
MIN1_ES2 "Molex 70543-03" 70543-03 4365,2145 r180 top (schematic designator MIN1)
MIN1_ES3 "Molex 70543-03" 70543-03 3950,2145 r180 top (schematic designator MIN1)
"Motor Power" "con-phoenix-508 - 2" "MSTBV2 - duplicate" 5270,300 r270 top
P1 "ERASE" HDR1X2 2610,1790 r180 top
P2_TR1 "Molex 70543-02" 70543-02 4465,2670 r90 top (schematic designator P2)
P2_TR2 "Molex 70543-02" 70543-02 4465,3055 r90 top (schematic designator P2)
Q2 "IRML6346TRPBF" IRLML6346 940,4057.58 r90 top
Q3 "IRML6346TRPBF" IRLML6346 505,4057.58 r90 top
Q4 "PSMN7R0-60YS" PSMN7R0-60YS 1736.5,3732.02 r90 top
Q5 "PSMN7R0-60YS" PSMN7R0-60YS 2130,3731.64 r90 top
Q6 "PSMN7R0-60YS" PSMN7R0-60YS 2536,3731.22 r90 top
Q7 "PSMN7R0-60YS" PSMN7R0-60YS 2936,3731.22 r90 top
R1 "Res3" J1-0603 4185,3250 r0 top
R2_ES1 "0603" J1-0603 3685.47,1660 r0 top (schematic designator R2)
R2_ES2 "0603" J1-0603 4520.47,1660 r0 top (schematic designator R2)
R2_ES3 "0603" J1-0603 4105.47,1660 r0 top (schematic designator R2)
R3_ES1 "0603" J1-0603 3380.47,1660 r180 top (schematic designator R3)
R3_ES2 "0603" J1-0603 4210.47,1660 r180 top (schematic designator R3)
R3_ES3 "0603" J1-0603 3795.47,1660 r180 top (schematic designator R3)
R4 "0603" J1-0603 1350,2375 r90 top
R5 "0603" J1-0603 1450,2640 r90 top
R6 "0603" J1-0603 1300,2250 r270 top
R7 "10K" R0603 5151.57,1277.31 r0 top
R8 "Res3" "SM 0805 - gap trimmed" 4798.57,1412.31 r90 top
R9 "0.6r" 2512R-0.55 5271.57,1529.31 r90 top
R10 "10K" R0603 5275.57,1361.31 r180 top
R11 "Res3" "SM 0805 - gap trimmed" 5188,2565 r0 top
R12 "10K" R0603 5275.57,1298.31 r0 top
R13 "0805" "SM 0805 - gap trimmed" 1140,4050 r270 top
R14_TR1 "Res3" J1-0603 4290,2635 r0 top (schematic designator R14)
R14_TR2 "Res3" J1-0603 4290,3020 r0 top (schematic designator R14)
R15 "0603" J1-0603 1265,2715 r180 top
R16 "0603" J1-0603 1265,2765 r180 top
R17 "200K" R0402 5075.57,1270.31 r270 top
R18 "0603" J1-0603 654.12,2765 r180 top
R19_TR1 "Res3" J1-0603 4290,2700 r180 top (schematic designator R19)
R19_TR2 "Res3" J1-0603 4290,3085 r180 top (schematic designator R19)
R20 "0603" J1-0603 654.12,2715 r180 top
R21 "Res3" J1-0603 266,3374 r270 top
R22 "0603" J1-0603 1440,2540 r270 top
R23 "0603" J1-0603 1300,2535 r0 top
R25 "Res3" "SM 0805 - gap trimmed" 5251,1986 r0 top
R30_M1 "0603" J1-0603 410,580 r90 top (schematic designator R30)
R30_M2 "0603" J1-0603 1285,580 r90 top (schematic designator R30)
R30_M3 "0603" J1-0603 2160,580 r90 top (schematic designator R30)
R30_M4 "0603" J1-0603 3035,580 r90 top (schematic designator R30)
R30_M5 "0603" J1-0603 3910,580 r90 top (schematic designator R30)
R31_M1 "0603" J1-0603 970,610 r270 top (schematic designator R31)
R31_M2 "0603" J1-0603 1845,610 r270 top (schematic designator R31)
R31_M3 "0603" J1-0603 2720,610 r270 top (schematic designator R31)
R31_M4 "0603" J1-0603 3595,610 r270 top (schematic designator R31)
R31_M5 "0603" J1-0603 4470,610 r270 top (schematic designator R31)
R32_M1 "2512" Resistor2512 960,835 r270 top (schematic designator R32)
R32_M2 "2512" Resistor2512 1835,835 r270 top (schematic designator R32)
R32_M3 "2512" Resistor2512 2710,835 r270 top (schematic designator R32)
R32_M4 "2512" Resistor2512 3585,835 r270 top (schematic designator R32)
R32_M5 "2512" Resistor2512 4460,835 r270 top (schematic designator R32)
R33_M1 "2512" Resistor2512 400,835 r270 top (schematic designator R33)
R33_M2 "2512" Resistor2512 1275,835 r270 top (schematic designator R33)
R33_M3 "2512" Resistor2512 2150,835 r270 top (schematic designator R33)
R33_M4 "2512" Resistor2512 3025,835 r270 top (schematic designator R33)
R33_M5 "2512" Resistor2512 3900,835 r270 top (schematic designator R33)
R45 "0603" J1-0603 835,4015 r90 top
R46 "0603" J1-0603 860,3935 r0 top
R47 "0805" "SM 0805 - gap trimmed" 705,4050 r270 top
R52 "0603" J1-0603 400,4015 r90 top
R55 "0603" J1-0603 425,3935 r0 top
R56 "0805" "SM 0805 - gap trimmed" 1530,3808.64 r90 top
R58 "0603" J1-0603 1860,3605 r90 top
R59 "0603" J1-0603 1830,3520 r180 top
R60 "0805" "SM 0805 - gap trimmed" 1924,3808.64 r90 top
R62 "0603" J1-0603 2259,3635 r90 top
R63 "0603" J1-0603 2229,3555 r180 top
R64 "0805" "SM 0805 - gap trimmed" 2330,3808.22 r90 top
R66 "0603" J1-0603 2665,3634.58 r90 top
R67 "0603" J1-0603 2635,3554.58 r180 top
R68 "0805" "SM 0805 - gap trimmed" 2730,3808.22 r90 top
R70 "0603" J1-0603 3065,3634.58 r90 top
R71 "0603" J1-0603 3035,3554.58 r180 top
S1 "1571610-2" B3F-31XX 125,3345 r270 top
T2_TC1 "Molex 70543-02" 70543-02 3910,2670 r90 top (schematic designator T2)
T2_TC2 "Molex 70543-02" 70543-02 3910,3055 r90 top (schematic designator T2)
TP1 "TP4" TP-2#1 4870,1970 r90 top
TP2 "TP4" TP-2#1 4105,2905 r90 top
TP3 "TP4" TP-2#2 5290,2365 r270 bottom
TP4 "TP4" TP-2#1 3585,2555 r90 top
TP5 "TP4" TP-2#1 3640,2935 r90 top
TP6 "TP4" TP-2#1 3295,2395 r90 top
TP7 "TP4" TP-2#1 3311,2660 r90 top
TP8 "TP4" TP-2#1 2815,2550 r90 top
TP9_ES1 "TP4" TP-2#2 3635,2265 r270 bottom (schematic designator TP9)
TP9_ES2 "TP4" TP-2#2 4465,2265 r270 bottom (schematic designator TP9)
TP9_ES3 "TP4" TP-2#2 4050,2265 r270 bottom (schematic designator TP9)
TP10_ES1 "TP4" TP-2#2 3435,2025 r270 bottom (schematic designator TP10)
TP10_ES2 "TP4" TP-2#2 4265,2025 r270 bottom (schematic designator TP10)
TP10_ES3 "TP4" TP-2#2 3850,2025 r270 bottom (schematic designator TP10)
TP11 "TP4" TP-2#2 1790,4220 r270 bottom
TP12 "TP4" TP-2#2 2191,4221 r90 bottom
TP13 "TP4" TP-2#2 2591,4221 r270 bottom
TP14 "TP4" TP-2#2 2991,4221 r270 bottom
TP32_M1 "TP4" TP-2#1 715,1155 r90 top (schematic designator TP32)
TP32_M2 "TP4" TP-2#1 1590,1155 r270 top (schematic designator TP32)
TP32_M3 "TP4" TP-2#1 2465,1155 r270 top (schematic designator TP32)
TP32_M4 "TP4" TP-2#1 3340,1155 r270 top (schematic designator TP32)
TP32_M5 "TP4" TP-2#1 4215,1155 r270 top (schematic designator TP32)
TP33_M1 "TP4" TP-2#1 1035,1145 r90 top (schematic designator TP33)
TP33_M2 "TP4" TP-2#1 1910,1145 r270 top (schematic designator TP33)
TP33_M3 "TP4" TP-2#1 2785,1145 r270 top (schematic designator TP33)
TP33_M4 "TP4" TP-2#1 3660,1145 r270 top (schematic designator TP33)
TP33_M5 "TP4" TP-2#1 4535,1145 r270 top (schematic designator TP33)
TP35_M1 "TP4" TP-2#1 575,1155 r90 top (schematic designator TP35)
TP35_M2 "TP4" TP-2#1 1450,1155 r90 top (schematic designator TP35)
TP35_M3 "TP4" TP-2#1 2325,1155 r90 top (schematic designator TP35)
TP35_M4 "TP4" TP-2#1 3200,1155 r90 top (schematic designator TP35)
TP35_M5 "TP4" TP-2#1 4075,1155 r90 top (schematic designator TP35)
TP36_M1 "TP4" TP-2#1 610,1090 r90 top (schematic designator TP36)
TP36_M2 "TP4" TP-2#1 1485,1090 r90 top (schematic designator TP36)
TP36_M3 "TP4" TP-2#1 2360,1090 r90 top (schematic designator TP36)
TP36_M4 "TP4" TP-2#1 3235,1090 r90 top (schematic designator TP36)
TP36_M5 "TP4" TP-2#1 4110,1090 r90 top (schematic designator TP36)
TP37_M1 "TP4" TP-2#1 645,1155 r90 top (schematic designator TP37)
TP37_M2 "TP4" TP-2#1 1520,1155 r90 top (schematic designator TP37)
TP37_M3 "TP4" TP-2#1 2395,1155 r90 top (schematic designator TP37)
TP37_M4 "TP4" TP-2#1 3270,1155 r90 top (schematic designator TP37)
TP37_M5 "TP4" TP-2#1 4145,1155 r90 top (schematic designator TP37)
TP38 "TP4" TP-2#2 3165,2495 r270 bottom
TP39_M1 "TP4" TP-2#1 750,1090 r90 top (schematic designator TP39)
TP39_M2 "TP4" TP-2#1 1625,1090 r90 top (schematic designator TP39)
TP39_M3 "TP4" TP-2#1 2500,1090 r90 top (schematic designator TP39)
TP39_M4 "TP4" TP-2#1 3375,1090 r90 top (schematic designator TP39)
TP39_M5 "TP4" TP-2#1 4250,1090 r90 top (schematic designator TP39)
TP40_M1 "TP4" TP-2#1 680,1090 r90 top (schematic designator TP40)
TP40_M2 "TP4" TP-2#1 1555,1090 r90 top (schematic designator TP40)
TP40_M3 "TP4" TP-2#1 2430,1090 r90 top (schematic designator TP40)
TP40_M4 "TP4" TP-2#1 3305,1090 r90 top (schematic designator TP40)
TP40_M5 "TP4" TP-2#1 4180,1090 r90 top (schematic designator TP40)
TP41 "TP4" TP-2#2 830,3875 r0 bottom
TP42 "TP4" TP-2#1 395.47,3875.47 r180 top
TP43 "TP4" TP-2#2 2955,2555 r270 bottom
TP44 "TP4" TP-2#2 2995,2495 r270 bottom
TP45 "TP4" TP-2#2 3040,2555 r270 bottom
TP46 "TP4" TP-2#2 3085,2495 r270 bottom
TP47 "TP4" TP-2#2 3125,2555 r270 bottom
TP48 "TP4" TP-2#1 1860,3282 r90 top
TP49 "TP4" TP-2#1 2260,3283 r90 top
TP50 "TP4" TP-2#1 2665,3281 r90 top
TP51 "TP4" TP-2#1 3065,3282 r90 top
TP52_TR1 "TP4" TP-2#1 3675,2485 r90 top (schematic designator TP52)
TP52_TR2 "TP4" TP-2#1 3500,2525 r90 top (schematic designator TP52)
U1 "LM25011MY/NOPB" VSSOP10 5084.57,1439.31 r90 top
U2 "MIC5209-3.3YS" SOT230P700X190-4N 4943,2263 r180 top
U3 "ATML-ATSAM3X-LQFP-144" LQFP144_N 1973.9,2255 r270 top locked
U4_TC1 "MAX31855EASA+" MAXM-S8+4_N 3635,2675 r90 top (schematic designator U4)
U4_TC2 "MAX31855EASA+" MAXM-S8+4_N 3635,3060 r90 top (schematic designator U4)
U5 "PMEG2005AEV115" PMEG2005AEV115 3265,2215 r180 top
U6 "ADuM4160" ADuM4160 970,2840 r0 top
U7_M1 "DRV8825" DRV8825 680,830 r90 top (schematic designator U7)
U7_M2 "DRV8825" DRV8825 1555,830 r90 top (schematic designator U7)
U7_M3 "DRV8825" DRV8825 2430,830 r90 top (schematic designator U7)
U7_M4 "DRV8825" DRV8825 3305,830 r90 top (schematic designator U7)
U7_M5 "DRV8825" DRV8825 4180,830 r90 top (schematic designator U7)
U8 "TXB0106 Level Shifter" TSOP65P640X120-16N 3305,2925 r90 top
USB "USB-B" PN61729 175,2800 r270 top
X2 "445C35A12M00000" 445C35A12M00000 1448.9,2965 r0 top

## Footprints (in the part's own frame and the unit in brackets; to place one, negate y for a bottom-side part, rotate by r counter-clockwise, add the part's x,y. Pads: shape width x height; smd on the part's side, far side on the other; paste and mask are expansions set on the pad)
1N4148WT [mm] "Molded Diode, 2-Leads, Body 1.20x0.80mm, IPC Medium Density"
  rect 1x0.3 smd: 1(-0.675,0) 2(0.675,0)
  silkscreen extent -0.7,-0.5 1.15,0.55, body extent -0.65,-0.45 0.65,0.45, height 0.7
4POL254 [mil]
  oval 60x120 hole 40: 1(-150,0) 2(-50,0) 3(50,0) 4(150,0)
  silkscreen extent -250,-150 250,113, body extent -250,-150 250,113, height 454
10X2-0.05X0.1w [mil]
  round 36 hole 22: 1(225,50) 2(175,50) 3(125,50) 4(75,50) 5(25,50) 6(-25,50) 7(-75,50) 8(-125,50) 9(-175,50) 12(-175,-50) 13(-125,-50) 14(-75,-50) 15(-25,-50) 16(25,-50) 17(75,-50) 18(125,-50) 19(175,-50) 20(225,-50)
  oval 54x36 hole 22 copper offset -9,0: 10(-225,50) 11(-225,-50)
  silkscreen extent -375,-150 375,200, body extent -375,-150 375,200, height 591
445C35A12M00000 [mm] "Crystal Oscillator"
  rect 1.8x2.4 smd: 1(0,0) 2(3.8,0)
  silkscreen extent -1.65,-1.91 5.46,1.91, body extent -1.27,-1.52 5.08,1.52, height 1
1608[0603] [mm] "Chip Capacitor, Body 1.6x0.8mm, IPC High Density"
  rect 0.8x0.9 smd: 1(-0.7,0) 2(0.7,0)
  body extent -0.87,-0.48 0.87,0.48, height 1.3
2512R-0.55 [mm] "2512 Resistor 6.35mm x 3.2mm x 0.55mm"
  rect 0.9x3.3 smd: 1(-2.95,0) 2(2.95,0)
  silkscreen extent -2.1,-1.55 2.1,1.55, body extent -3.22,-1.68 3.22,1.68, height 0.65
"3522-2 - WAVE SOLDER" [mil] "3522-2"
  oct 140x200 hole 100: 1(-280,0) 1(-80,0) 2(80,0) 2(280,0)
  silkscreen extent -400,-100 400,100, body extent -402,-103 402,103, height 709
70543-02 [mil]
  oval 60x120 hole 40: 1(-50,0) 2(50,0)
  silkscreen extent -150,-150 150,113, body extent -150,-150 150,113, height 450
70543-03 [mil]
  oval 60x120 hole 40: 1(-100,0) 2(0,0) 3(100,0)
  silkscreen extent -200,-150 200,113, body extent -200,-150 200,113, height 450
ADuM4160 [mm] "SOIC, 16-Leads, Body 10.30x7.50mm, Pitch 1.27mm, IPC Medium Density"
  oval 2.3x0.6 smd: 1(-4.575,4.445) 2(-4.575,3.175) 3(-4.575,1.905) 4(-4.575,0.635) 5(-4.575,-0.635) 6(-4.575,-1.905) 7(-4.575,-3.175) 8(-4.575,-4.445) 9(4.575,-4.445) 10(4.575,-3.175) 11(4.575,-1.905) 12(4.575,-0.635) 13(4.575,0.635) 14(4.575,1.905) 15(4.575,3.175) 16(4.575,4.445)
  silkscreen extent -4.7,-5.25 3.03,5.42, body extent -3.8,-5.25 3.8,5.25, height 2.65
B3F-31XX [mil]
  oct 70x70 hole 40: 1(-89,-49) 2(89,-49)
  round 100 hole 59: 3(-138,49) 4(138,49)
  silkscreen extent -145,-165 145,10, body extent -165,-200 165,109, height 303
BLM18PG121SN1D [mm] "Chip Inductor, 2-Leads, Body 1.0x0.5mm, IPC Medium Density"
  rect 0.8x0.6 smd: 1(-0.6,0) 2(0.6,0)
  body extent -0.52,-0.28 0.53,0.27, height 0.6
C0402 [mil]
  rrect40% 22x24 smd: 1(-18.7,0) 2(19,0)
  body extent -20,-10 20,10, height 20
C0603 [mm]
  rrect40% 0.74x1 smd: 1(-0.68,0) 2(0.68,0)
  body extent -0.8,-0.4 0.8,0.4, height 0.8
C0805 [mil]
  rrect50% 52x60 smd: 1(-37.4,0) 2(38,0)
  body extent -40,-30 40,30, height 35
C1206 [mm] "Chip Capacitor, Body 3.2x1.6mm, IPC High Density"
  rect 1.1x1.7 smd: 1(-1.35,0) 2(1.35,0)
  silkscreen extent -0.4,-0.75 0.4,0.75, body extent -1.7,-0.9 1.7,0.9, height 1.3
C1210 [mm] "Chip Capacitor, Body 3.2x2.5mm, IPC High Density"
  rect 1.1x2.6 smd: 1(-1.35,0) 2(1.35,0)
  silkscreen extent -0.4,-1.2 0.4,1.2, body extent -1.7,-1.35 1.7,1.35, height 1.3
DRV8825 [mm] "TSOP, 28-Leads, Body 9.70x4.40mm, Pitch 0.65mm, Thermal Pad 5.22.2x3.10.2mm, IPC Medium Density"
  oval 1.7x0.35 smd: 1(-2.85,4.225) 2(-2.85,3.575) 3(-2.85,2.925) 4(-2.85,2.275) 5(-2.85,1.625) 6(-2.85,0.975) 7(-2.85,0.325) 8(-2.85,-0.325) 9(-2.85,-0.975) 10(-2.85,-1.625) 11(-2.85,-2.275) 12(-2.85,-2.925) 13(-2.85,-3.575) 14(-2.85,-4.225) 15(2.85,-4.225) 16(2.85,-3.575) 17(2.85,-2.925) 18(2.85,-2.275) 19(2.85,-1.625) 20(2.85,-0.975) 21(2.85,-0.325) 22(2.85,0.325) 23(2.85,0.975) 24(2.85,1.625) 25(2.85,2.275) 26(2.85,2.925) 27(2.85,3.575) 28(2.85,4.225)
  rect 3.1x5.22 smd: 29(0,0)
  silkscreen extent -2.97,-4.9 1.6,5.07, body extent -2.25,-4.9 2.25,4.9, height 1.2
F1210_M [mm] "Bournes PTC Fuse"
  rect 1x2.5 smd: 1(-1.5,0) 2(1.5,0)
  silkscreen extent -0.4,-1.3 0.4,1.3, body extent -1.7,-1.35 1.7,1.4, height 0.85
FIDUCIAL-1X2 [mil]
  rrect100% 40x40 smd paste-3897.64 mask+20: 1(0,0)
  body extent -40,-40 40,40, height 1
FTSH-105-XX-X-DV [mm] "1.27mm pitch, 10 pin, terminal strip; vertical, SMT"
  rect 0.75x2.8 smd mask+0: 1(2.54,2.03) 2(2.54,-2.03) 3(1.27,2.03) 4(1.27,-2.03) 5(0,2.03) 6(0,-2.03) 7(-1.27,2.03) 8(-1.27,-2.03) 9(-2.54,2.03) 10(-2.54,-2.03)
  silkscreen extent 3.28,3.03 3.52,3.27
HDR1X2 [mm] "Connector; Header; 2 Position"
  rect 1.5x1.5 hole 0.9: 1(0,0)
  round 1.5 hole 0.9: 2(2.54,0)
  silkscreen extent -1.27,-1.27 3.81,1.27
IRLML6346 [mm] "SOT23, 3-Leads, Body 2.92x2.37mm, Pitch 0.95mm, IPC Medium Density"
  rect 1.6x0.6 smd: 1(-0.9,0.95) 2(-0.9,-0.95) 3(0.9,0)
  silkscreen extent -1.02,-1.5 0.7,1.92, body extent -0.7,-1.52 0.7,1.52, height 1.12
J1-0603 [mm] "Chip Resistor, Body 1.6x0.8mm, IPC High Density"
  rect 0.7x0.9 smd: 1(-0.75,0) 2(0.75,0)
  silkscreen extent -0.2,-0.35 0.2,0.35, body extent -0.85,-0.48 0.85,0.48, height 0.9
LQFP144_N [mm] "Thin QFP, 144-Leads, Body 20x20mm, Pitch 0.5mm, IPC Medium Density"
  oval 1.8x0.3 smd: 1(-10.55,8.75) 2(-10.55,8.25) 3(-10.55,7.75) 4(-10.55,7.25) 5(-10.55,6.75) 6(-10.55,6.25) 7(-10.55,5.75) 8(-10.55,5.25) 9(-10.55,4.75) 10(-10.55,4.25) 11(-10.55,3.75) 12(-10.55,3.25) 13(-10.55,2.75) 14(-10.55,2.25) 15(-10.55,1.75) 16(-10.55,1.25) 17(-10.55,0.75) 18(-10.55,0.25) 19(-10.55,-0.25) 20(-10.55,-0.75) 21(-10.55,-1.25) 22(-10.55,-1.75) 23(-10.55,-2.25) 24(-10.55,-2.75) 25(-10.55,-3.25) 26(-10.55,-3.75) 27(-10.55,-4.25) 28(-10.55,-4.75) 29(-10.55,-5.25) 30(-10.55,-5.75) 31(-10.55,-6.25) 32(-10.55,-6.75) 33(-10.55,-7.25) 34(-10.55,-7.75) 35(-10.55,-8.25) 36(-10.55,-8.75) 73(10.55,-8.75) 74(10.55,-8.25) 75(10.55,-7.75) 76(10.55,-7.25) 77(10.55,-6.75) 78(10.55,-6.25) 79(10.55,-5.75) 80(10.55,-5.25) 81(10.55,-4.75) 82(10.55,-4.25) 83(10.55,-3.75) 84(10.55,-3.25) 85(10.55,-2.75) 86(10.55,-2.25) 87(10.55,-1.75) 88(10.55,-1.25) 89(10.55,-0.75) 90(10.55,-0.25) 91(10.55,0.25) 92(10.55,0.75) 93(10.55,1.25) 94(10.55,1.75) 95(10.55,2.25) 96(10.55,2.75) 97(10.55,3.25) 98(10.55,3.75) 99(10.55,4.25) 100(10.55,4.75) 101(10.55,5.25) 102(10.55,5.75) 103(10.55,6.25) 104(10.55,6.75) 105(10.55,7.25) 106(10.55,7.75) 107(10.55,8.25) 108(10.55,8.75)
  oval 0.3x1.8 smd: 37(-8.75,-10.55) 38(-8.25,-10.55) 39(-7.75,-10.55) 40(-7.25,-10.55) 41(-6.75,-10.55) 42(-6.25,-10.55) 43(-5.75,-10.55) 44(-5.25,-10.55) 45(-4.75,-10.55) 46(-4.25,-10.55) 47(-3.75,-10.55) 48(-3.25,-10.55) 49(-2.75,-10.55) 50(-2.25,-10.55) 51(-1.75,-10.55) 52(-1.25,-10.55) 53(-0.75,-10.55) 54(-0.25,-10.55) 55(0.25,-10.55) 56(0.75,-10.55) 57(1.25,-10.55) 58(1.75,-10.55) 59(2.25,-10.55) 60(2.75,-10.55) 61(3.25,-10.55) 62(3.75,-10.55) 63(4.25,-10.55) 64(4.75,-10.55) 65(5.25,-10.55) 66(5.75,-10.55) 67(6.25,-10.55) 68(6.75,-10.55) 69(7.25,-10.55) 70(7.75,-10.55) 71(8.25,-10.55) 72(8.75,-10.55) 109(8.75,10.55) 110(8.25,10.55) 111(7.75,10.55) 112(7.25,10.55) 113(6.75,10.55) 114(6.25,10.55) 115(5.75,10.55) 116(5.25,10.55) 117(4.75,10.55) 118(4.25,10.55) 119(3.75,10.55) 120(3.25,10.55) 121(2.75,10.55) 122(2.25,10.55) 123(1.75,10.55) 124(1.25,10.55) 125(0.75,10.55) 126(0.25,10.55) 127(-0.25,10.55) 128(-0.75,10.55) 129(-1.25,10.55) 130(-1.75,10.55) 131(-2.25,10.55) 132(-2.75,10.55) 133(-3.25,10.55) 134(-3.75,10.55) 135(-4.25,10.55) 136(-4.75,10.55) 137(-5.25,10.55) 138(-5.75,10.55) 139(-6.25,10.55) 140(-6.75,10.55) 141(-7.25,10.55) 142(-7.75,10.55) 143(-8.25,10.55) 144(-8.75,10.55)
  silkscreen extent -10.67,-9.25 9.25,9.58, body extent -10,-10 10,10, height 1.6
MAXM-S8+4_N [mm] "SOIC, 8-Leads, Body 4.9x3.9mm, Pitch 1.27mm, IPC Medium Density"
  oval 2.2x0.6 smd: 1(-2.4,1.905) 2(-2.4,0.635) 3(-2.4,-0.635) 4(-2.4,-1.905) 5(2.4,-1.905) 6(2.4,-0.635) 7(2.4,0.635) 8(2.4,1.905)
  silkscreen extent -2.52,-2.5 0.9,2.88, body extent -2,-2.5 2,2.5, height 1.75
"MSTBV2 - duplicate" [mil]
  oval 82.5x165 hole 55: 1(-300,0) 2(-100,0)
  silkscreen extent -425,-150 25,180, body extent -425,-150 25,180, height 472
MSTBV4#1 [mil]
  oval 165x82.5 hole 55: 1(0,700) 2(0,500) 3(0,300) 4(0,100) 5(0,-100) 6(0,-300) 7(0,-500) 8(0,-700)
  silkscreen extent -150,-825 180,825, body extent -150,-825 180,825, height 472
MSTBV4#2 [mil]
  oval 82.5x165 hole 55: 1(-300,0) 2(-100,0) 3(100,0) 4(300,0)
  silkscreen extent -425,-150 425,180, body extent -428,-153 428,183, height 472
OSHW_8X150_NOTEXT [mil]
  silkscreen extent 0,0 167,150, body extent 0,2 168,148
"Panasonic VS C" [mm]
  rect 3x1.4 smd: 1(5.348,2.921) 2(0.748,2.921)
  silkscreen extent 0.05,0.22 6.05,5.62, body extent 0.1,0.29 6,5.59, height 5.41
PMEG2005AEV115 [mm] "SOT23, 6-Leads, Body 1.7x1.7mm (max), Pitch 0.50mm, IPC Medium Density"
  rect 0.7x0.3 smd: 1(-0.75,0.5) 2(-0.75,0) 3(-0.75,-0.5) 4(0.75,-0.5) 5(0.75,0) 6(0.75,0.5)
  silkscreen extent -0.88,-0.85 0.1,1.32, body extent -0.65,-0.85 0.65,0.85, height 0.6
PN61729 [mil]
  round 54 hole 38: 1(50,186) 2(-49.21,186) 3(-49.21,107) 4(50,107)
  round 130.5 hole 87: 5(-236.22,0) 6(237,0)
  body extent -237,-405 238,226, height 406
PSMN7R0-60YS [mm] "TO, 5-Pads, Body 5.15x5.86mm (max), IPC Medium Density"
  rect 1.8x0.6 smd: 1(-2.6,1.905) 2(-2.6,0.635) 3(-2.6,-0.635) 4(-2.6,-1.905)
  rect 4.8x4.5 smd: 5(1.14,0)
  silkscreen extent -2.72,2.63 -2.48,2.88, body extent -1.85,-2.5 2.25,2.5, height 1.2
R0402 [mil]
  rrect40% 22x24 smd: 1(-18.9,0) 2(19,0)
  body extent -20,-10 20,10, height 14
R0603 [mm]
  rrect40% 0.74x1 smd: 1(-0.68,0) 2(0.68,0)
  body extent -0.8,-0.4 0.8,0.4, height 0.8
Resistor2512 [mm]
  rect 1.6x3.1 smd: 1(-3.25,0) 2(3.25,0)
  silkscreen extent -2.26,-1.3 2.26,1.3, body extent -3.24,-1.4 3.24,1.4, height 0.9
SK310A-TP [mm] "Molded Diode, 2-Leads, Body 4.31x2.69mm, IPC Medium Density"
  rect 2.3x2.15 smd: 1(-1.625,0) 2(1.625,0)
  silkscreen extent -2.3,-1.45 3.07,1.75, body extent -2.29,-1.42 2.28,1.42, height 2.95
"SM 0805 - gap trimmed" [mm]
  rect 1x1.5 smd: 1(-1.1,0) 2(1.1,0)
  silkscreen extent -0.36,-0.64 0.35,0.63
"SM 0805 polarized" [mm]
  rect 1x1.5 smd: 1(0.93,-1.105) 2(3.13,-1.105)
  silkscreen extent 0.1,-1.9 2.38,-0.3
SMA-SM [mil]
  rect 79x79 smd: A(79,0) C(-78.74,0)
  silkscreen extent -89,-49 89,50, body extent -105,-54 105,55, height 116
SOT95P230X110-3N [mm] "SOT23, 3-Leads, Body 2.90x2.30mm, Pitch 0.95mm, IPC Medium Density"
  rect 1.4x0.6 smd: 1(-0.95,0.95) 2(-0.95,-0.95) 3(0.95,0)
  silkscreen extent -1.07,-1.5 0.7,1.93, body extent -0.7,-1.5 0.7,1.5, height 1.1
SOT230P700X190-4N [mm] "SOT223, 4-Leads, Body 6.50x7.00mm (avg), Pitch 2.30mm, IPC Medium Density"
  rect 2.4x1 smd: 1(-2.9,2.3) 2(-2.9,0) 3(-2.9,-2.3)
  rect 2.4x3.25 smd: 4(2.9,0)
  silkscreen extent -3.03,-3.35 1.4,3.47, body extent -1.85,-3.35 1.85,3.35, height 1.9
SZMM3Z4V7T1G [mm] "Molded Diode, 2-Leads, Body 1.70x1.25mm, IPC Medium Density"
  rect 0.9x0.35 smd: 1(-1,0) 2(1,0)
  silkscreen extent -0.95,-0.7 1.4,0.7, body extent -0.9,-0.67 0.9,0.67, height 1
TP-2#1 [mil]
  round 50 smd far side: 1(0,0)
TP-2#2 [mil]
  round 50 smd: 1(0,0)
TSOP65P640X120-16N [mm] "TSOP, 16-Leads, Body 5.00x4.40mm, Pitch 0.65mm, IPC Medium Density"
  oval 1.65x0.35 smd: 1(-2.825,2.275) 2(-2.825,1.625) 3(-2.825,0.975) 4(-2.825,0.325) 5(-2.825,-0.325) 6(-2.825,-0.975) 7(-2.825,-1.625) 8(-2.825,-2.275) 9(2.825,-2.275) 10(2.825,-1.625) 11(2.825,-0.975) 12(2.825,-0.325) 13(2.825,0.325) 14(2.825,0.975) 15(2.825,1.625) 16(2.825,2.275)
  silkscreen extent -2.95,-2.55 1.6,3.12, body extent -2.25,-2.55 2.25,2.55, height 1.2
VSSOP10 [mm] "TSSOP, 10-Leads, Body 3.15x3.00mm, Pitch 0.50mm, Thermal Pad 2.05.2x1.50.2mm, IPC High Density"
  rect 1.02x0.3 smd mask+0.102: 1(-2.4,1) 2(-2.4,0.5) 3(-2.4,0) 4(-2.4,-0.5) 5(-2.4,-1) 6(2.4,-1) 7(2.4,-0.5) 8(2.4,0) 9(2.4,0.5) 10(2.4,1)
  rect 1.73x1.9 smd: 11(0,0)
  silkscreen extent -2.02,-1.7 0.65,1.82, body extent -1.55,-1.7 1.55,1.7, height 1.09
XAL50xx-153 [mm] "Precision Wire Wound Inductor, 2-Leads, Body 5.28x5.48mm, IPC High Density"
  rect 2.05x4.2 smd: 1(-2,0) 2(2,0)
  silkscreen extent -2.75,-2.85 2.75,2.85, body extent -2.74,-2.84 2.74,2.84, height 4.25

## Part data
C1_ES1 C1_ES2 C1_ES3 C2_ES1 C2_ES2 C2_ES3 C3 C4 C5 C6 C7 C8 C12 C13 C14 C17 C20 C23 C25 C26 C27 C28 C32 C33 C36 C37 C38 C39 C41 C42 C43 C44 C45 C46 C47 C48 C53 C54 C55 C56 C57 C58 C59 C60 C61 C64 C65 C66_M1 C66_M2 C66_M3 C66_M4 C66_M5 C68_M1 C68_M2 C68_M3 C68_M4 C68_M5 C71_M1 C71_M2 C71_M3 C71_M4 C71_M5 C73 C75_M1 C75_M2 C75_M3 C75_M4 C75_M5: library part "Cap Semi", "Capacitor (Semiconductor SIM Model)"
C9: library part C1206C475K5PACTU, "CAP CER 1206 4.7uF 50V 10% X5R"
C10: library part GRM21BR71H105KA12L, "CAP CER 0805 1uF 50V 10% X7R"
C11 C40: library part C0603C104K5RACTU, "CAP CER 0603 100nF 50V 10% X7R"
C21: library part C0805C106K8PACTU, "CAP CER 0805 10uF 10V 10% X5R"
C22: library part GRM155R60J105KE19D, "CAP CER 0402 1uF 6.3V 10% X5R"
C24 C29: library part "Cap Pol3", "Polarized Capacitor (Surface Mount)"
C30_TR1 C30_TR2 C31_TC1 C31_TC2 C63: "Capacitor (Semiconductor SIM Model)"
C69_M1 C69_M2 C69_M3 C69_M4 C69_M5: library part "Cap Pol1", "Polarized Capacitor (Radial)"
D1: library part "D Zener", "Zener Diode"
D2: library part SK310A, "DIODE Schottky 3A SMA"
D3_TR1 D3_TR2 D5_TR1 D5_TR2: "High Conductance Fast Diode"
D4 D6 D12 D15 D17 D19: library part "D Schottky", "Schottky Diode"
D7 D9: "Typical RED, GREEN, YELLOW, AMBER GaAs LED"
D8: "DIODE TVS 30V SMA"
D10 D11 D13 D14 D16 D18: "Typical RED GaAs LED"
DA1 DA2 DA3 DA4: "PESDxL2BT TVS Diode Array 2x"
F1 F2 F3 F4: library part "Fuse 1", "Fuse"
FETS: library part con-phoenix-508
"Heat Power": library part con-phoenix-508_4
JTAG/DEBUG: library part "ARM Cortex JTAG-DEBUG Header"
L1: "IND 15uH 3.9A 20%"
M1_M1 M1_M2 M1_M3 M1_M4 M1_M5: library part "Molex 0705430003 Alt", "Molex 4 Pin Clip Connector"
MAX1_ES1 MAX1_ES2 MAX1_ES3 MIN1_ES1 MIN1_ES2 MIN1_ES3: library part "Molex Endstop"
"Motor Power": library part con-phoenix-508_2
P1: library part "Header 2", "Header, 2-Pin"
Q2 Q3 Q4 Q5 Q6 Q7: "N-Channel MOSFET"
R1 R8 R11 R14_TR1 R14_TR2 R19_TR1 R19_TR2 R21 R25: "Resistor"
R2_ES1 R2_ES2 R2_ES3 R3_ES1 R3_ES2 R3_ES3 R4 R5 R6 R13 R15 R16 R18 R20 R22 R23 R30_M1 R30_M2 R30_M3 R30_M4 R30_M5 R31_M1 R31_M2 R31_M3 R31_M4 R31_M5 R32_M1 R32_M2 R32_M3 R32_M4 R32_M5 R33_M1 R33_M2 R33_M3 R33_M4 R33_M5 R45 R46 R47 R52 R55 R56 R58 R59 R60 R62 R63 R64 R66 R67 R68 R70 R71: library part Res3, "Resistor"
R7 R10 R12: library part ERJ-3EKF1002V, "RES 0603 10K 100mW 1%"
R9: library part RL2512FK-070R06L, "RES 0.06 OHM 1W 1% 2512 SMD"
R17: library part CRCW0402200KFKED, "RES 0402 22r 63mW 1%"
S1: library part 1571610-2_1, "SWTCH Momentary Washable"
TP1 TP2 TP3 TP4 TP5 TP6 TP7 TP8 TP9_ES1 TP9_ES2 TP9_ES3 TP10_ES1 TP10_ES2 TP10_ES3 TP11 TP12 TP13 TP14 TP32_M1 TP32_M2 TP32_M3 TP32_M4 TP32_M5 TP33_M1 TP33_M2 TP33_M3 TP33_M4 TP33_M5 TP35_M1 TP35_M2 TP35_M3 TP35_M4 TP35_M5 TP36_M1 TP36_M2 TP36_M3 TP36_M4 TP36_M5 TP37_M1 TP37_M2 TP37_M3 TP37_M4 TP37_M5 TP38 TP39_M1 TP39_M2 TP39_M3 TP39_M4 TP39_M5 TP40_M1 TP40_M2 TP40_M3 TP40_M4 TP40_M5 TP41 TP42 TP43 TP44 TP45 TP46 TP47 TP48 TP49 TP50 TP51 TP52_TR1 TP52_TR2: library part Socket, "Socket"
U1: library part LM25011, "REG BUCK"
U4_TC1 U4_TC2: "Cold Junction Compensated Thermocouple to Digital Converter, 14 Bits Temperature Resolution, -40 to 125 degC, 8-Pin SOIC (S8+4), Pb-Free"
U6: "USB Opto Isolator"
U7_M1 U7_M2 U7_M3 U7_M4 U7_M5: "DRV8825 Ti Stepper Driver"
U8: library part TXB0106, "TXB0106 - Bidriectional Opendrain/pushpull level shift"
X2: library part XTAL, "Crystal Oscillator"

## Free pads (board coordinates)
  rect 150x150 hole 100: ""(130,130) ""(135,4465) ""(5365,135) ""(5365,4465)

## Via types
v1: diameter 25, hole 15, Top Layer to Bottom Layer, tented both sides, 594 vias
v2: diameter 30, hole 15, Top Layer to Bottom Layer, tented both sides, 518 vias
v3: diameter 19.68, hole 7.87, Top Layer to Bottom Layer, tented both sides, 75 vias
v4: diameter 50, hole 28, Top Layer to Bottom Layer, tented both sides, 10 vias
v5: diameter 30, hole 15, Top Layer to Bottom Layer, 9 vias
v6: diameter 45, hole 20, Top Layer to Bottom Layer, tented both sides, 9 vias

## Nets (pads, with @x,y where several pads share a name; then routed paths per layer and width w, separated by ;. In a path a pad name is that pad's centre, name@x,y a point inside that pad or via, vN(x,y) a via of type N, cw(c..) or ccw(c..) an arc to the next point about the centre after c; other vN are vias at no path point)
3.3VCC: C7.2 C25.2 C26.1 C29.1 C31_TC1.2 C31_TC2.2 C45.2 C46.2 C47.2 C48.2 C64.2 EXP0.12 EXP1.12 EXP2.12 FB5.1 FB6.1 FB7.1 FB8.1 FB9.1 JTAG/DEBUG.1 MAX1_ES1.3 MAX1_ES2.3 MAX1_ES3.3 MIN1_ES1.3 MIN1_ES2.3 MIN1_ES3.3 P1.1 R2_ES1.1 R2_ES2.1 R2_ES3.1 R3_ES1.1 R3_ES2.1 R3_ES3.1 R6.1 R11.2 R19_TR1.2 R19_TR2.2 R21.2 TP3.1 U2.3 U3.11 U3.62 U3.105 U3.125 U4_TC1.4 U4_TC2.4 U5.1 U5.2 U5.5 U5.6 U7_M1.16 U7_M1.17 U7_M2.16 U7_M2.17 U7_M3.16 U7_M3.17 U7_M4.16 U7_M4.17 U7_M5.16 U7_M5.17 U8.2 U8.8 | length 3821.9
  Top Layer w8: v2(1255,2070) 1373.38,2070 1374.19,2069.19 1387.35,2082.35 C48.2@1398.9,2070.81 ; FB9.1@1571.38,1695 FB9.1@1572.56,1695 ; C64.2@1622.56,1642.56 C64.2@1622.56,1645 ; U3.11@2121.54,2670.35 2121.54,2766.54 2125,2770 2125,2825 C47.2@2150,2850 ; C45.2@2235,1680 2256.55,1701.55 2256.55,1701.99 2255.81,1702.73 2255.81,1747.27 2259.33,1750.79 U3.105@2259.33,1839.65 ; U3.125@2389.25,2225.47 2538.43,2225.47 C46.2@2548.9,2215 ; JTAG/DEBUG.1@2859.92,2875 JTAG/DEBUG.1@2860,2874.92
  Top Layer w10: v2(266,3297) R21.2@266,3344.47 ; U7_M1.17@795,942.36 v2(795,1020) ; v2(1092.9,2248.62) 1145.12,2248.62 FB5.1@1145.12,2252.8 ; v2(1093.9,2325) 1127.9,2291 1282.43,2291 R6.1@1293.9,2279.53 ; v2(1148.9,2325) 1148.9,2328.62 FB7.1@1193.9,2373.62 ; v2(1153.9,2483.62) FB8.1@1193.9,2483.62 ; C48.2@1398.9,2072.56 1398.9,2075 1404.46,2080.56 1484.6,2080.56 1511.4,2107.36 U3.62@1558.54,2107.36 ; v2(1545,1600) 1560,1615 1595,1615 C64.2@1622.56,1642.56 ; FB9.1@1572.56,1695 C64.2@1622.56,1645 ; U7_M2.17@1670,942.36 v2(1670,1020) ; C47.2@2150,2850 v2(2190,2850) ; v2(2225,1640) 2225,1670 C45.2@2235,1680 ; U7_M3.17@2545,942.36 v2(2545,1020) ; C46.2@2567.15,2209.19 2571.34,2205 v2(2600,2205) ; v2(3055,2845) C25.2@3092.44,2845 ; C25.2@3102,2847.56 C26.1@3152,2847.56 3173.44,2869 3228,2869 3241.02,2855.98 ; v1(3235,2165) 3235.47,2165.47 U5.6@3235.47,2195.32 U5.5@3235.47,2215 ; U8.2@3241.02,2813.78 3241.02,2855.98 ; U5.2@3294.53,2215 3295,2214.53 v1(3295,2165) ; U8.8@3394.57,2813.78 3394.57,2855.43 3381,2869 3254.05,2869 3241.02,2855.98 ; R3_ES1.1@3410,1660 v2(3445,1660) ; U7_M4.17@3420,942.36 v2(3420,1020) ; v2(3620,1660) R2_ES1.1@3655.95,1660 ; C31_TC2.2@3775,2982.05 3812.95,2982.05 v2(3825,2970) ; R3_ES3.1@3825,1660 v2(3860,1660) ; v2(4040,1660) R2_ES3.1@4075.95,1660 ; R3_ES2.1@4240,1660 v2(4275,1660) ; v2(4260,2745) 4260,2700.47 R19_TR1.2@4260.47,2700 ; R19_TR2.2@4260.47,3085 4260.47,3115.47 v1(4280,3135) ; U7_M5.17@4295,942.36 v2(4295,1020) ; v2(4455,1660) R2_ES2.1@4490.95,1660
  Top Layer w12: U7_M1.17@795.16,942.2 U7_M1.16@820.75,942.2 ; U7_M2.17@1670.16,942.2 U7_M2.16@1695.75,942.2 ; U7_M3.17@2545.16,942.2 U7_M3.16@2570.75,942.2 ; U7_M4.17@3420.16,942.2 U7_M4.16@3445.75,942.2 ; U7_M5.17@4295.16,942.2 U7_M5.16@4320.75,942.2
  Top Layer w15: v2(1340,1845) 1382.52,1845 FB6.1@1383.9,1843.62 ; v2(2860,2840) JTAG/DEBUG.1@2860,2874.92 ; U4_TC1.4@3710,2580.51 3721.02,2580.51 3737.56,2597.05 3770,2597.05 v2(3770,2639.49) ; U4_TC2.4@3710,2965.51 3721.02,2965.51 3737.56,2982.05 C31_TC2.2@3770,2982.05
  Top Layer w40: U2.3@5057.17,2353.55 5057.17,2379.17 5085.15,2407.15 C7.2@5085.15,2455 5231.55,2455 5231.55,2564.76 R11.2@5231.31,2565 ; v6(5231,2365) C29.1@5231,2453.55 ; C29.1@5244.55,2442 v6(5293,2442)
  Bottom Layer w10: v6(5231,2365) TP3.1@5290,2365
+5VCC: C11.1 C17.1 C20.1 C21.1 C24.1 EXP0.9 EXP1.9 EXP2.9 L1.2 R7.2 R8.2 R10.1 R25.1 TP1.1 U8.15 | length 12482.1
  Top Layer w12: C17.1@3152,3003.44 3171.44,2984 3231,2984 3241.02,2994.02 U8.15@3241.02,3036.22
  Top Layer w15: v2(3137,2931) 3102,2966 C20.1@3102,3003.44 C17.1@3152,3003.44 ; R8.2@4798.57,1455.62 4798.57,1533.31 4798.57,1628.31 ; R7.2@5178.35,1277.32 5178.57,1277.09 v2(5178.57,1229.31) ; R10.1@5302.34,1361.31 v2(5339.57,1361.31)
  Top Layer w30: v2(540,1915) 585,1960 EXP1.9@585,2105 ; v6(4798.57,1803.31) C24.1@4798.57,1713.76 4798.57,1628.31 4828.35,1598.54 C11.1@4888.57,1598.54 4916.31,1598.54 4956.48,1638.72 C21.1@4960.57,1638.72 ; C21.1@4968.83,1646.98 L1.2@4968.83,1804.31
  Top Layer w40: v6(4870,2028) 4912,1986 R25.1@5207.69,1986
  Bottom Layer w30: v2(540,1915) 127,1915 52,1990 ; EXP2.9@585,1505 585,1475 520,1410 150,1410 52,1508 52,1990 ; v2(3137,2931) 3441,2931 3489,2979 3489,3195.41 ; EXP0.9@5260,2760 5260,2780 5235,2805 4815,2805 4771,2849 4771,3049 4554,3266 3559.59,3266 3489,3195.41 ; 52,1990 52,3052.82 134.18,3135 945,3135 1450,3640 3080,3640 3160,3560 3160,3325 3215,3270 3414.41,3270 3489,3195.41
  Bottom Layer w40: v6(4798.57,1803.31) 4870,1874.74 4870,2135 4910,2175 5270,2175 5350,2255 5350,2620 5260,2710 EXP0.9@5260,2760
+12VCC1: C9.1 C10.1 C66_M1.1 C66_M2.1 C66_M3.1 C66_M4.1 C66_M5.1 C69_M1.1 C69_M2.1 C69_M3.1 C69_M4.1 C69_M5.1 D8.C F3.2 R17.2 R30_M1.1 R30_M2.1 R30_M3.1 R30_M4.1 R30_M5.1 U1.1 U7_M1.4 U7_M1.11 U7_M2.4 U7_M2.11 U7_M3.4 U7_M3.11 U7_M4.4 U7_M4.11 U7_M5.4 U7_M5.11 | length 4662.8
  Top Layer w12: 525,614 590.43,679.43 U7_M1.4@590.43,717.8 ; U7_M1.11@769.57,717.8 769.57,679.43 850,599 ; 1465.43,675.43 U7_M2.4@1465.43,717.8 ; 1644.57,675.43 U7_M2.11@1644.57,717.8 ; 2340.43,670.43 U7_M3.4@2340.43,717.8 ; 2519.57,679.43 U7_M3.11@2519.57,717.8 ; 3215.43,675.43 U7_M4.4@3215.43,717.8 ; 3394.57,675.43 U7_M4.11@3394.57,717.8 ; 4090.43,675.43 U7_M5.4@4090.43,717.8 ; 4269.57,675.43 U7_M5.11@4269.57,717.8 ; C10.1@5036.05,1291.68 5045.2,1300.83 U1.1@5045.2,1344.83
  Top Layer w24: C9.1@4986.57,1328.15 4986.57,1302.72 C10.1@5018.98,1270.31 ; C10.1@5037.98,1251.31 R17.2@5075.57,1251.31
  Top Layer w25: R30_M1.1@410,550.47 525,550.47 ; 525,580 525,614 ; R30_M2.1@1285,550.47 1400,550.47 ; 1400,580 1400,610 1465.43,675.43 ; 1644.57,675.43 1725,595 ; R30_M3.1@2160,550.47 2275,550.47 ; 2275,580 2275,605 2340.43,670.43 ; 2519.57,679.43 2600,599 ; R30_M4.1@3035,550.47 3150,550.47 ; 3150,580 3150,610 3215.43,675.43 ; 3394.57,675.43 3475,595 ; R30_M5.1@3910,550.47 4025,550.47 ; 4025,580 4025,610 4090.43,675.43 ; 4269.57,675.43 4350,595
  Top Layer w40: v4(525,370) 525,580 ; C69_M1.1@850,440.55 850,599 ; v4(890,365) C69_M1.1@890,440 ; v4(1400,360) 1400,580 ; C69_M2.1@1725,440.55 1725,595 ; v4(1765,365) C69_M2.1@1765,445 ; v4(2275,370) 2275,580 ; C69_M3.1@2600,440.55 2600,599 ; v4(2640,365) C69_M3.1@2640,445 ; v4(3150,365) 3150,580 ; C69_M4.1@3475,440.55 3475,595 ; v4(3515,365) C69_M4.1@3515,445 ; v4(4025,360) 4025,580 ; C69_M5.1@4350,440.55 4350,595 ; v4(4395,365) C69_M5.1@4395,440 ; v6(4894,1331) 4911.17,1348.17 C9.1@4966.57,1348.17
  other v1: 4675,70 4735,70 4795,70 4855,70 4915,70 4675,130 4735,130 4795,130 4855,130 4915,130 4675,191 4735,191 4795,191 4855,191 4915,191 4675,251 4735,251 4795,251 4855,251 4915,251 4675,312 4735,312 4795,312 4855,312 4915,312 4675,372 4735,372 4795,372 4855,372 4915,372 4675,433 4735,433 4795,433 4855,433 4915,433 4675,493 4735,493 4795,493 4855,493 4915,493 4675,554 4735,554 4795,554 4855,554 4915,554 4675,614 4735,614 4795,614 4855,614 4915,614 4675,675 4735,675 4795,675 4855,675 4915,675 4675,735 4735,735 4795,735 4855,735 4915,735